# Altium PCB bch-stmnode_v0.2.PcbDoc (part 1 of 3)
Units mm, origin at the board's own origin, x right, y up, seen from the top; angles counter-clockwise.
Board outline 93.3 x 100 mm, 4 copper layers (Top Layer, GND, VCC, Bot Layer), stack 1.564 mm thick; 151 components, 115 nets, 605 pads, 422 vias.
Unrouted connection lines stored in the file: 4.
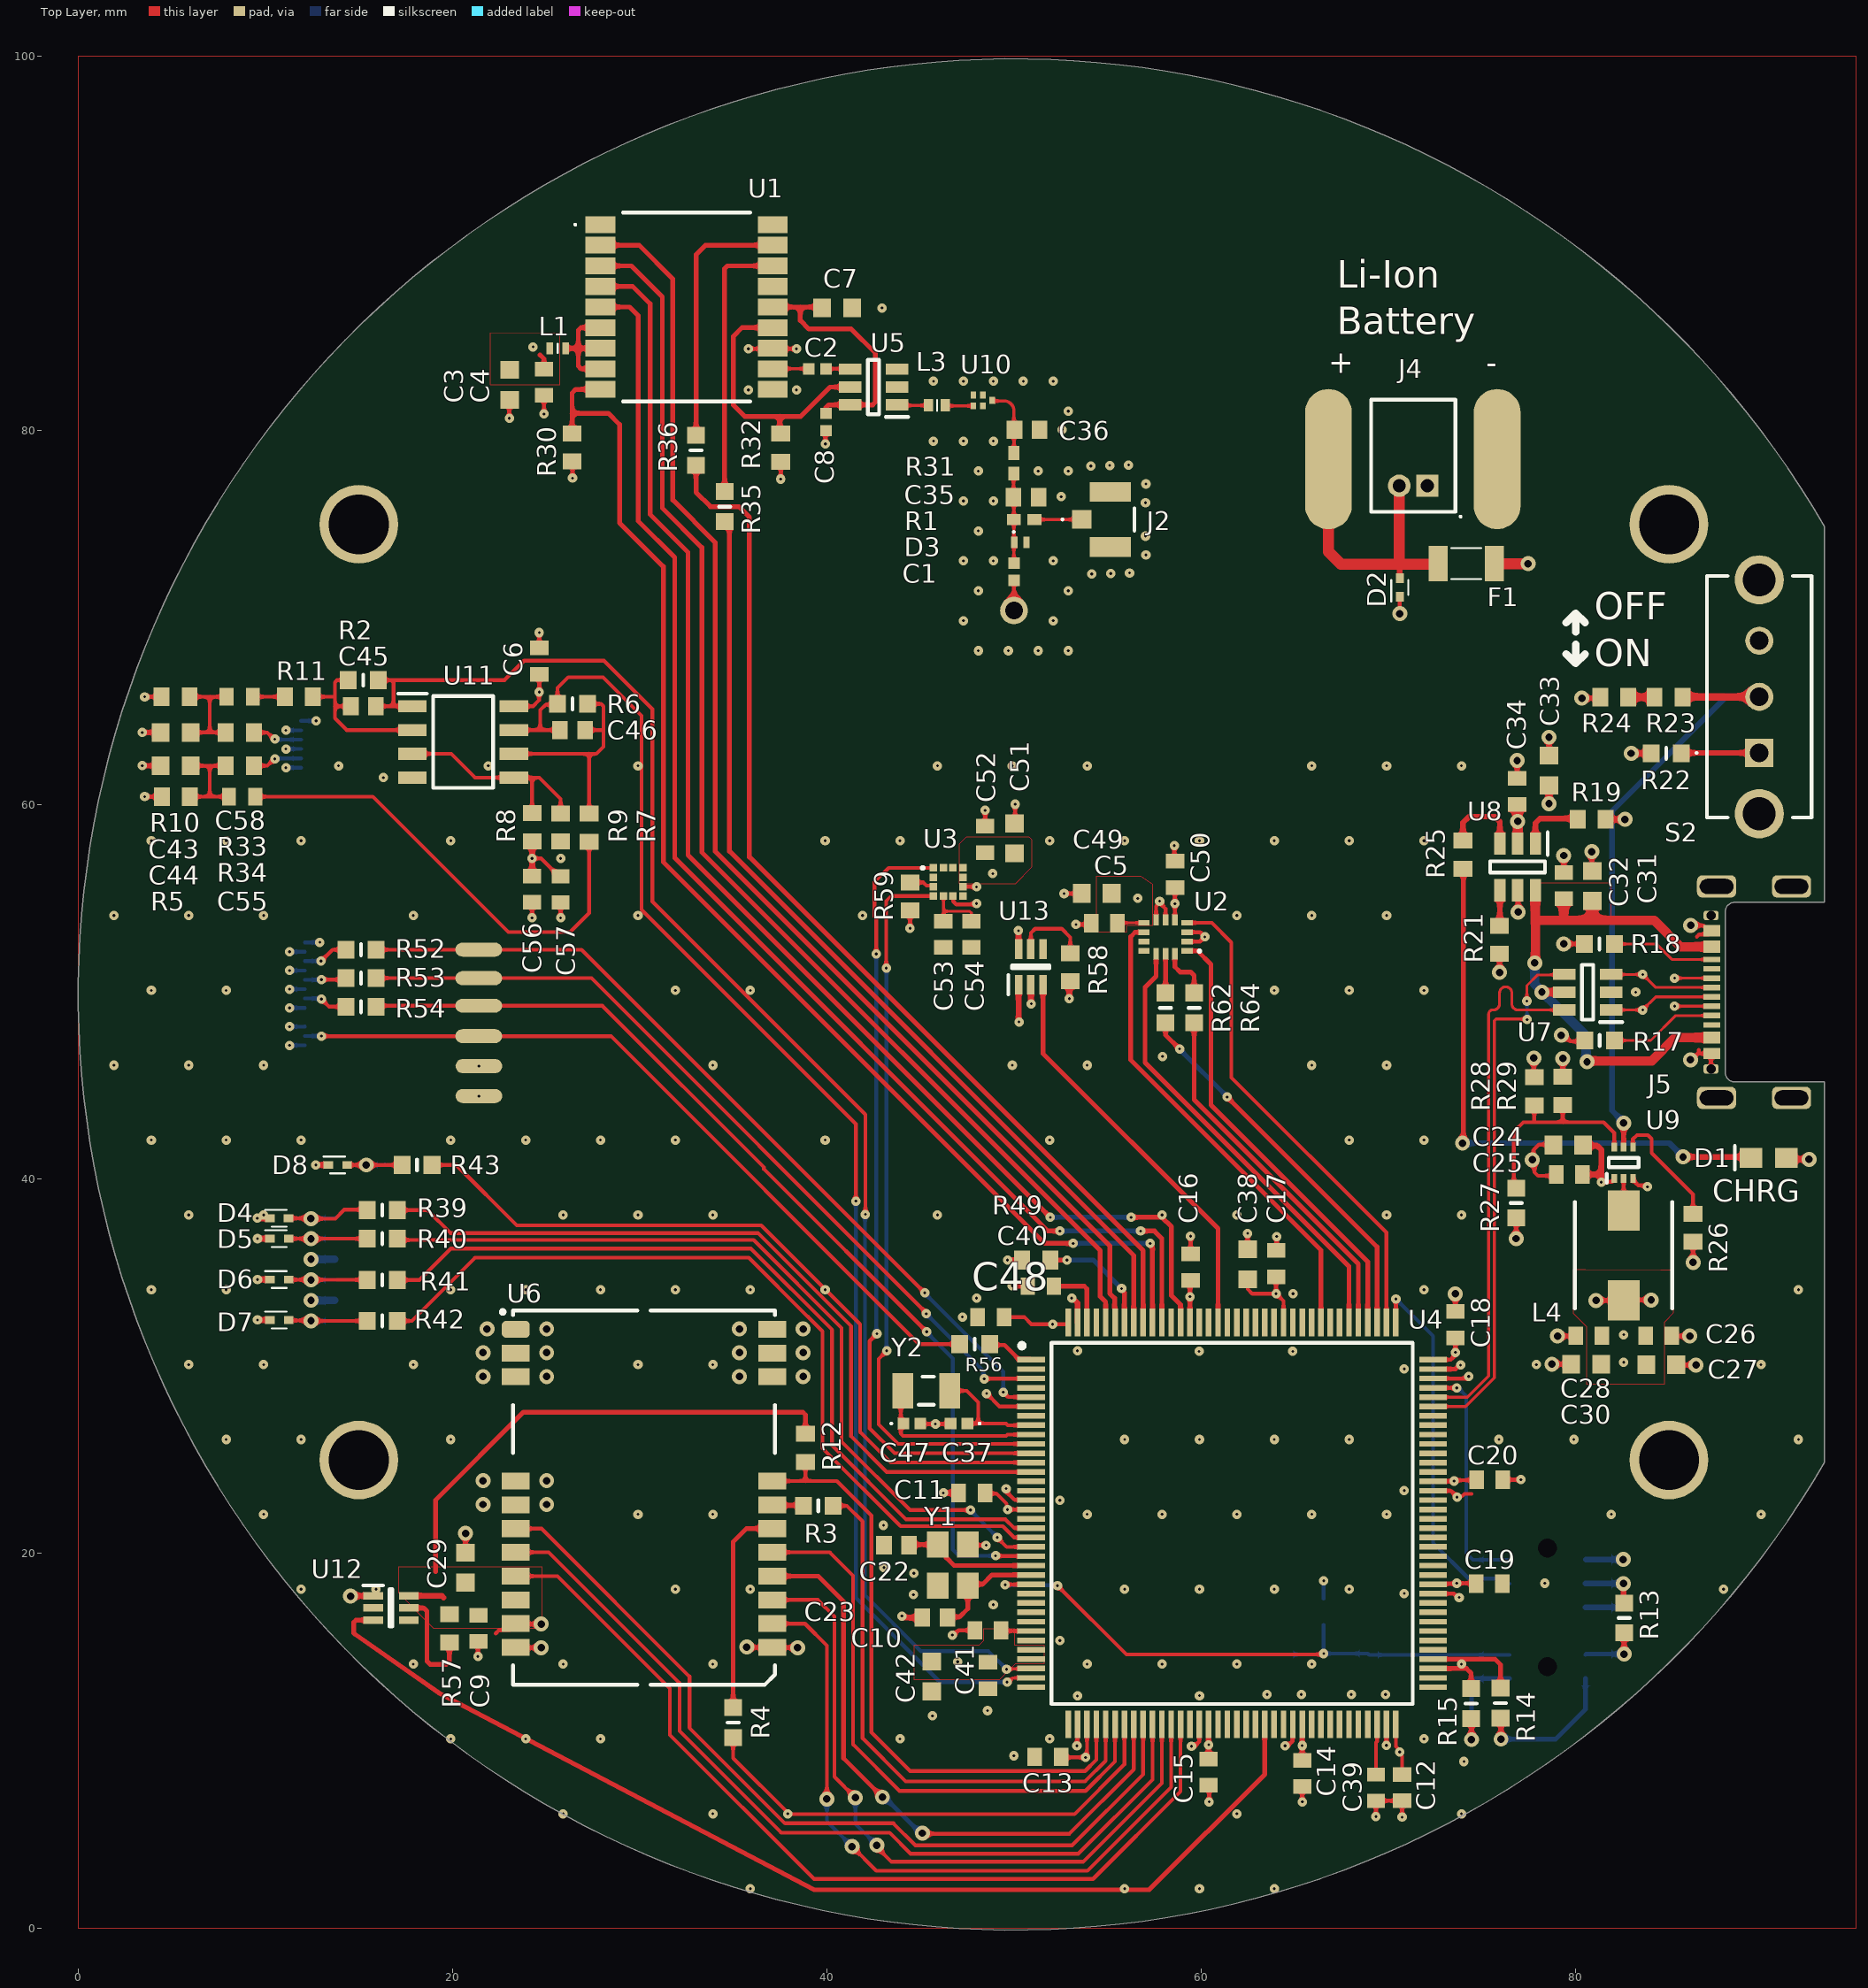
[diagram p0: Top Layer view]
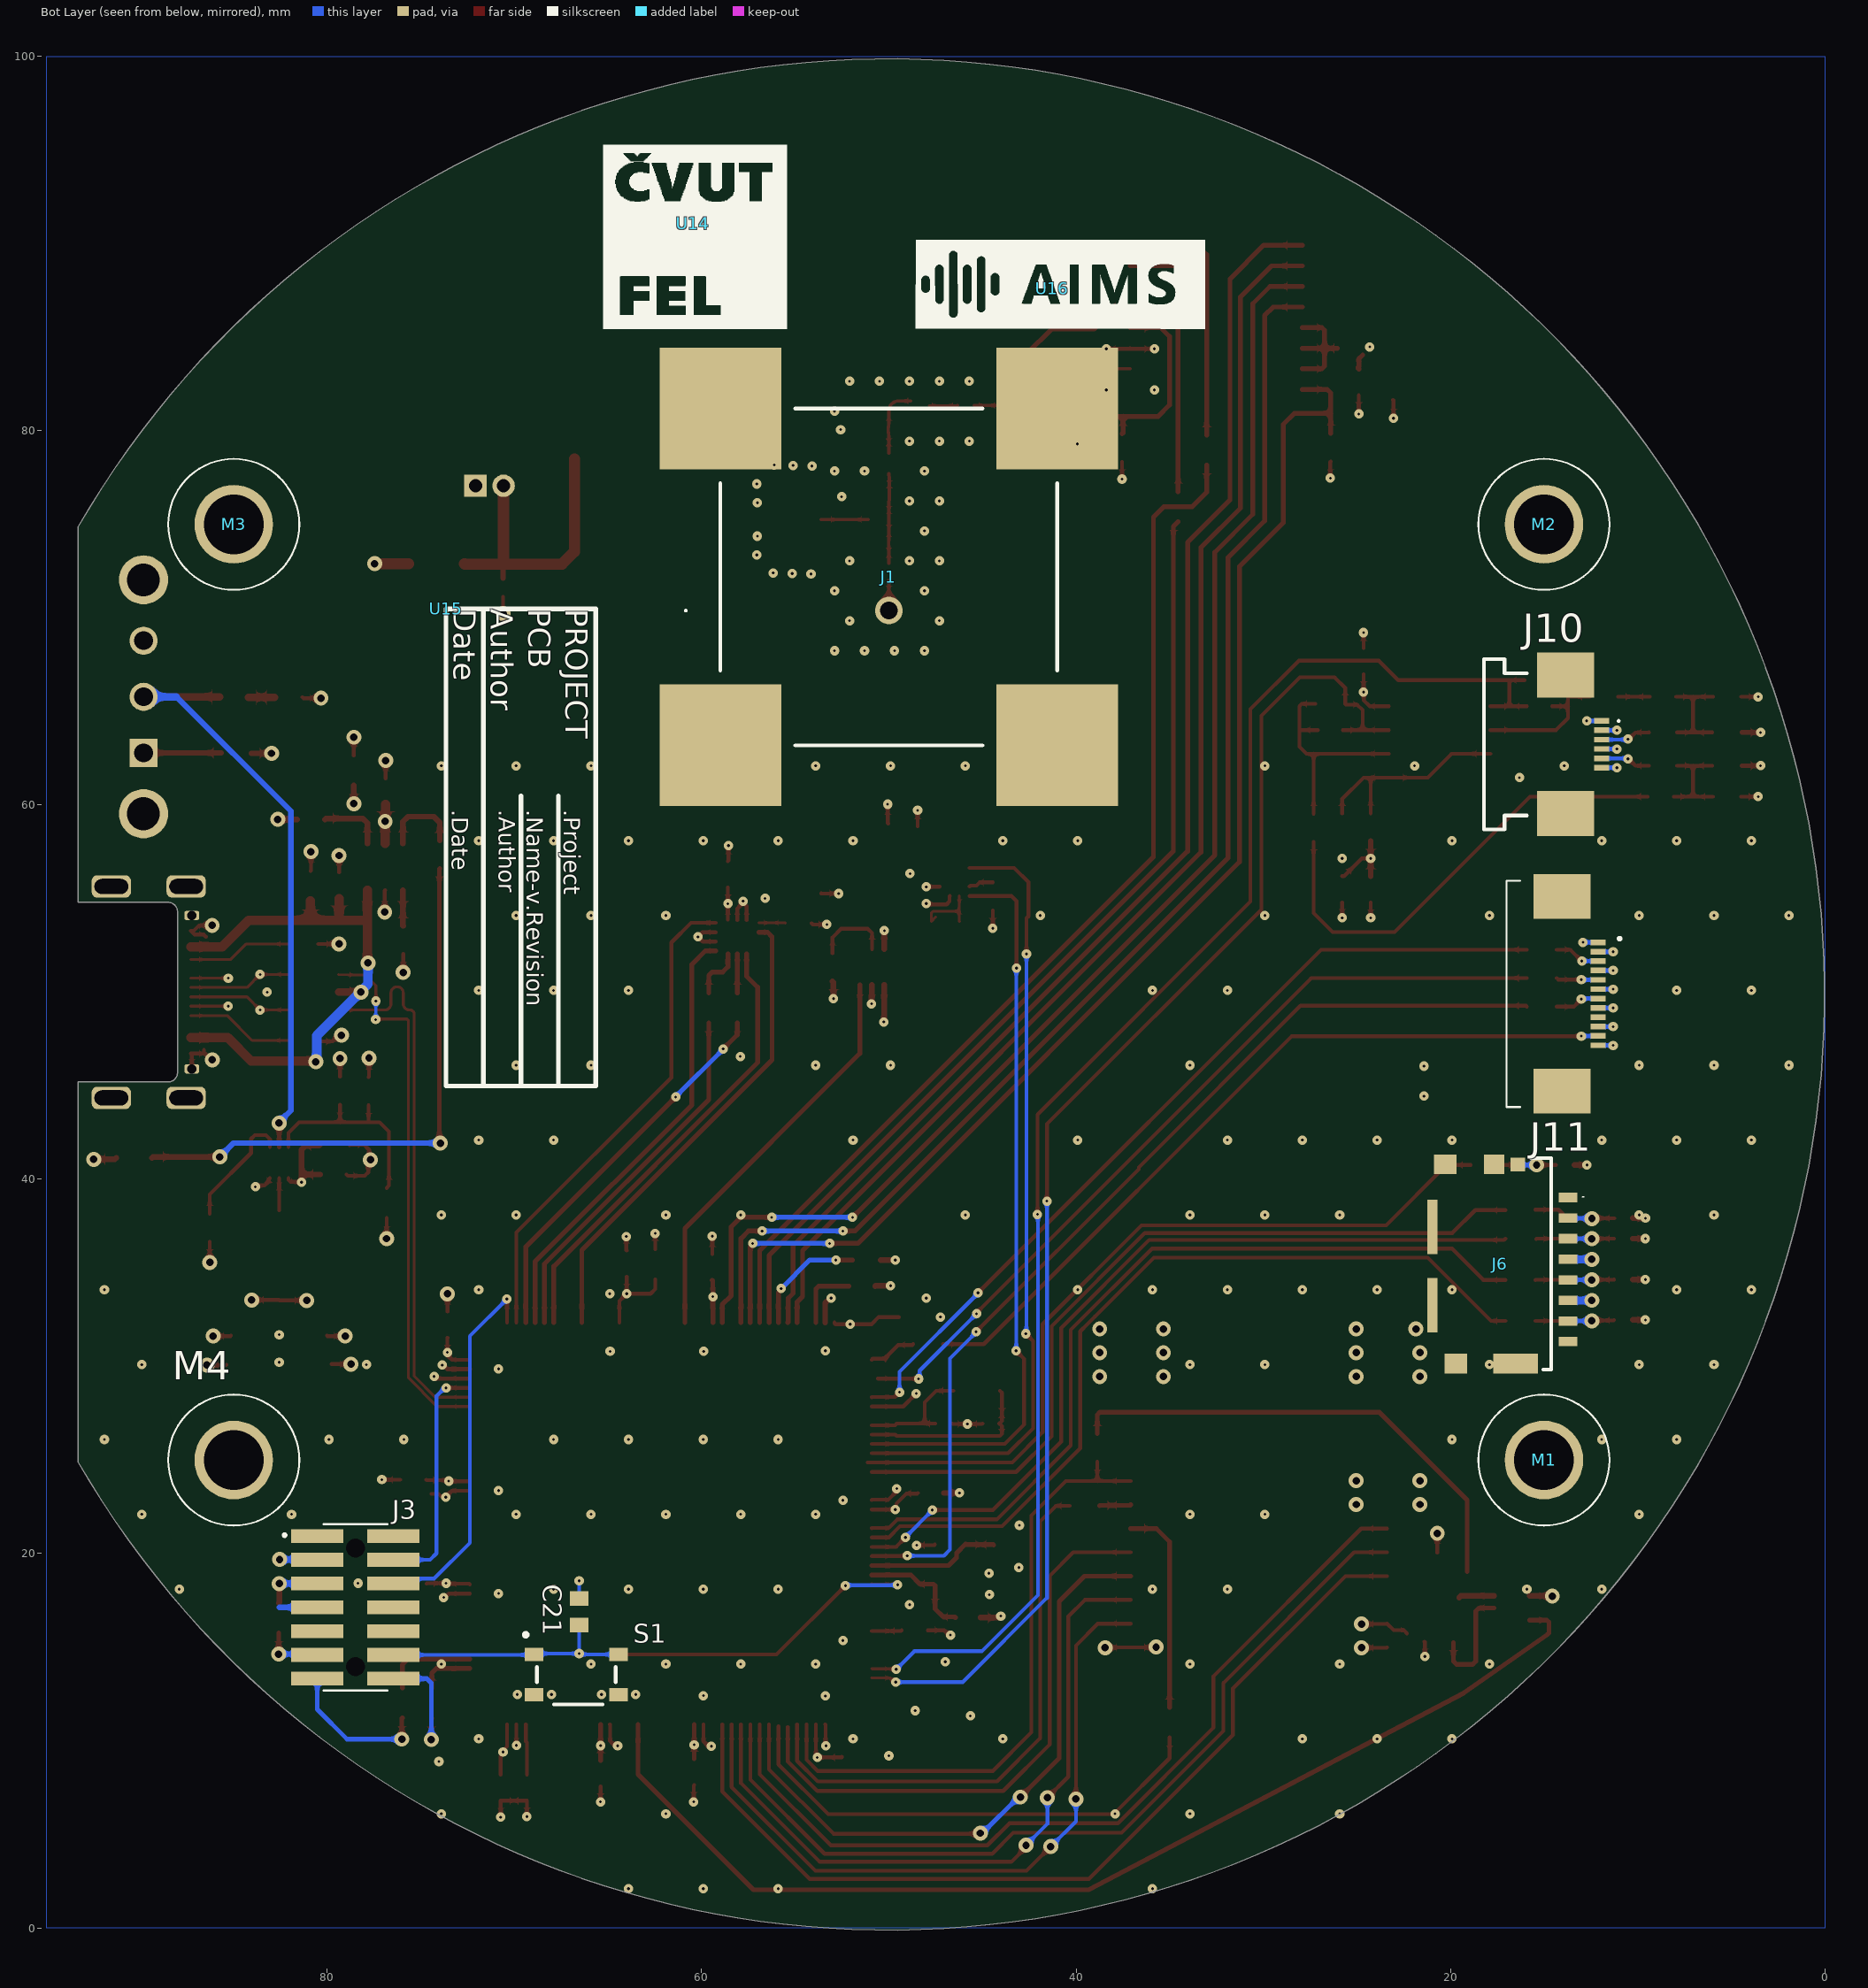
[diagram p1: Bot Layer view, seen from below]
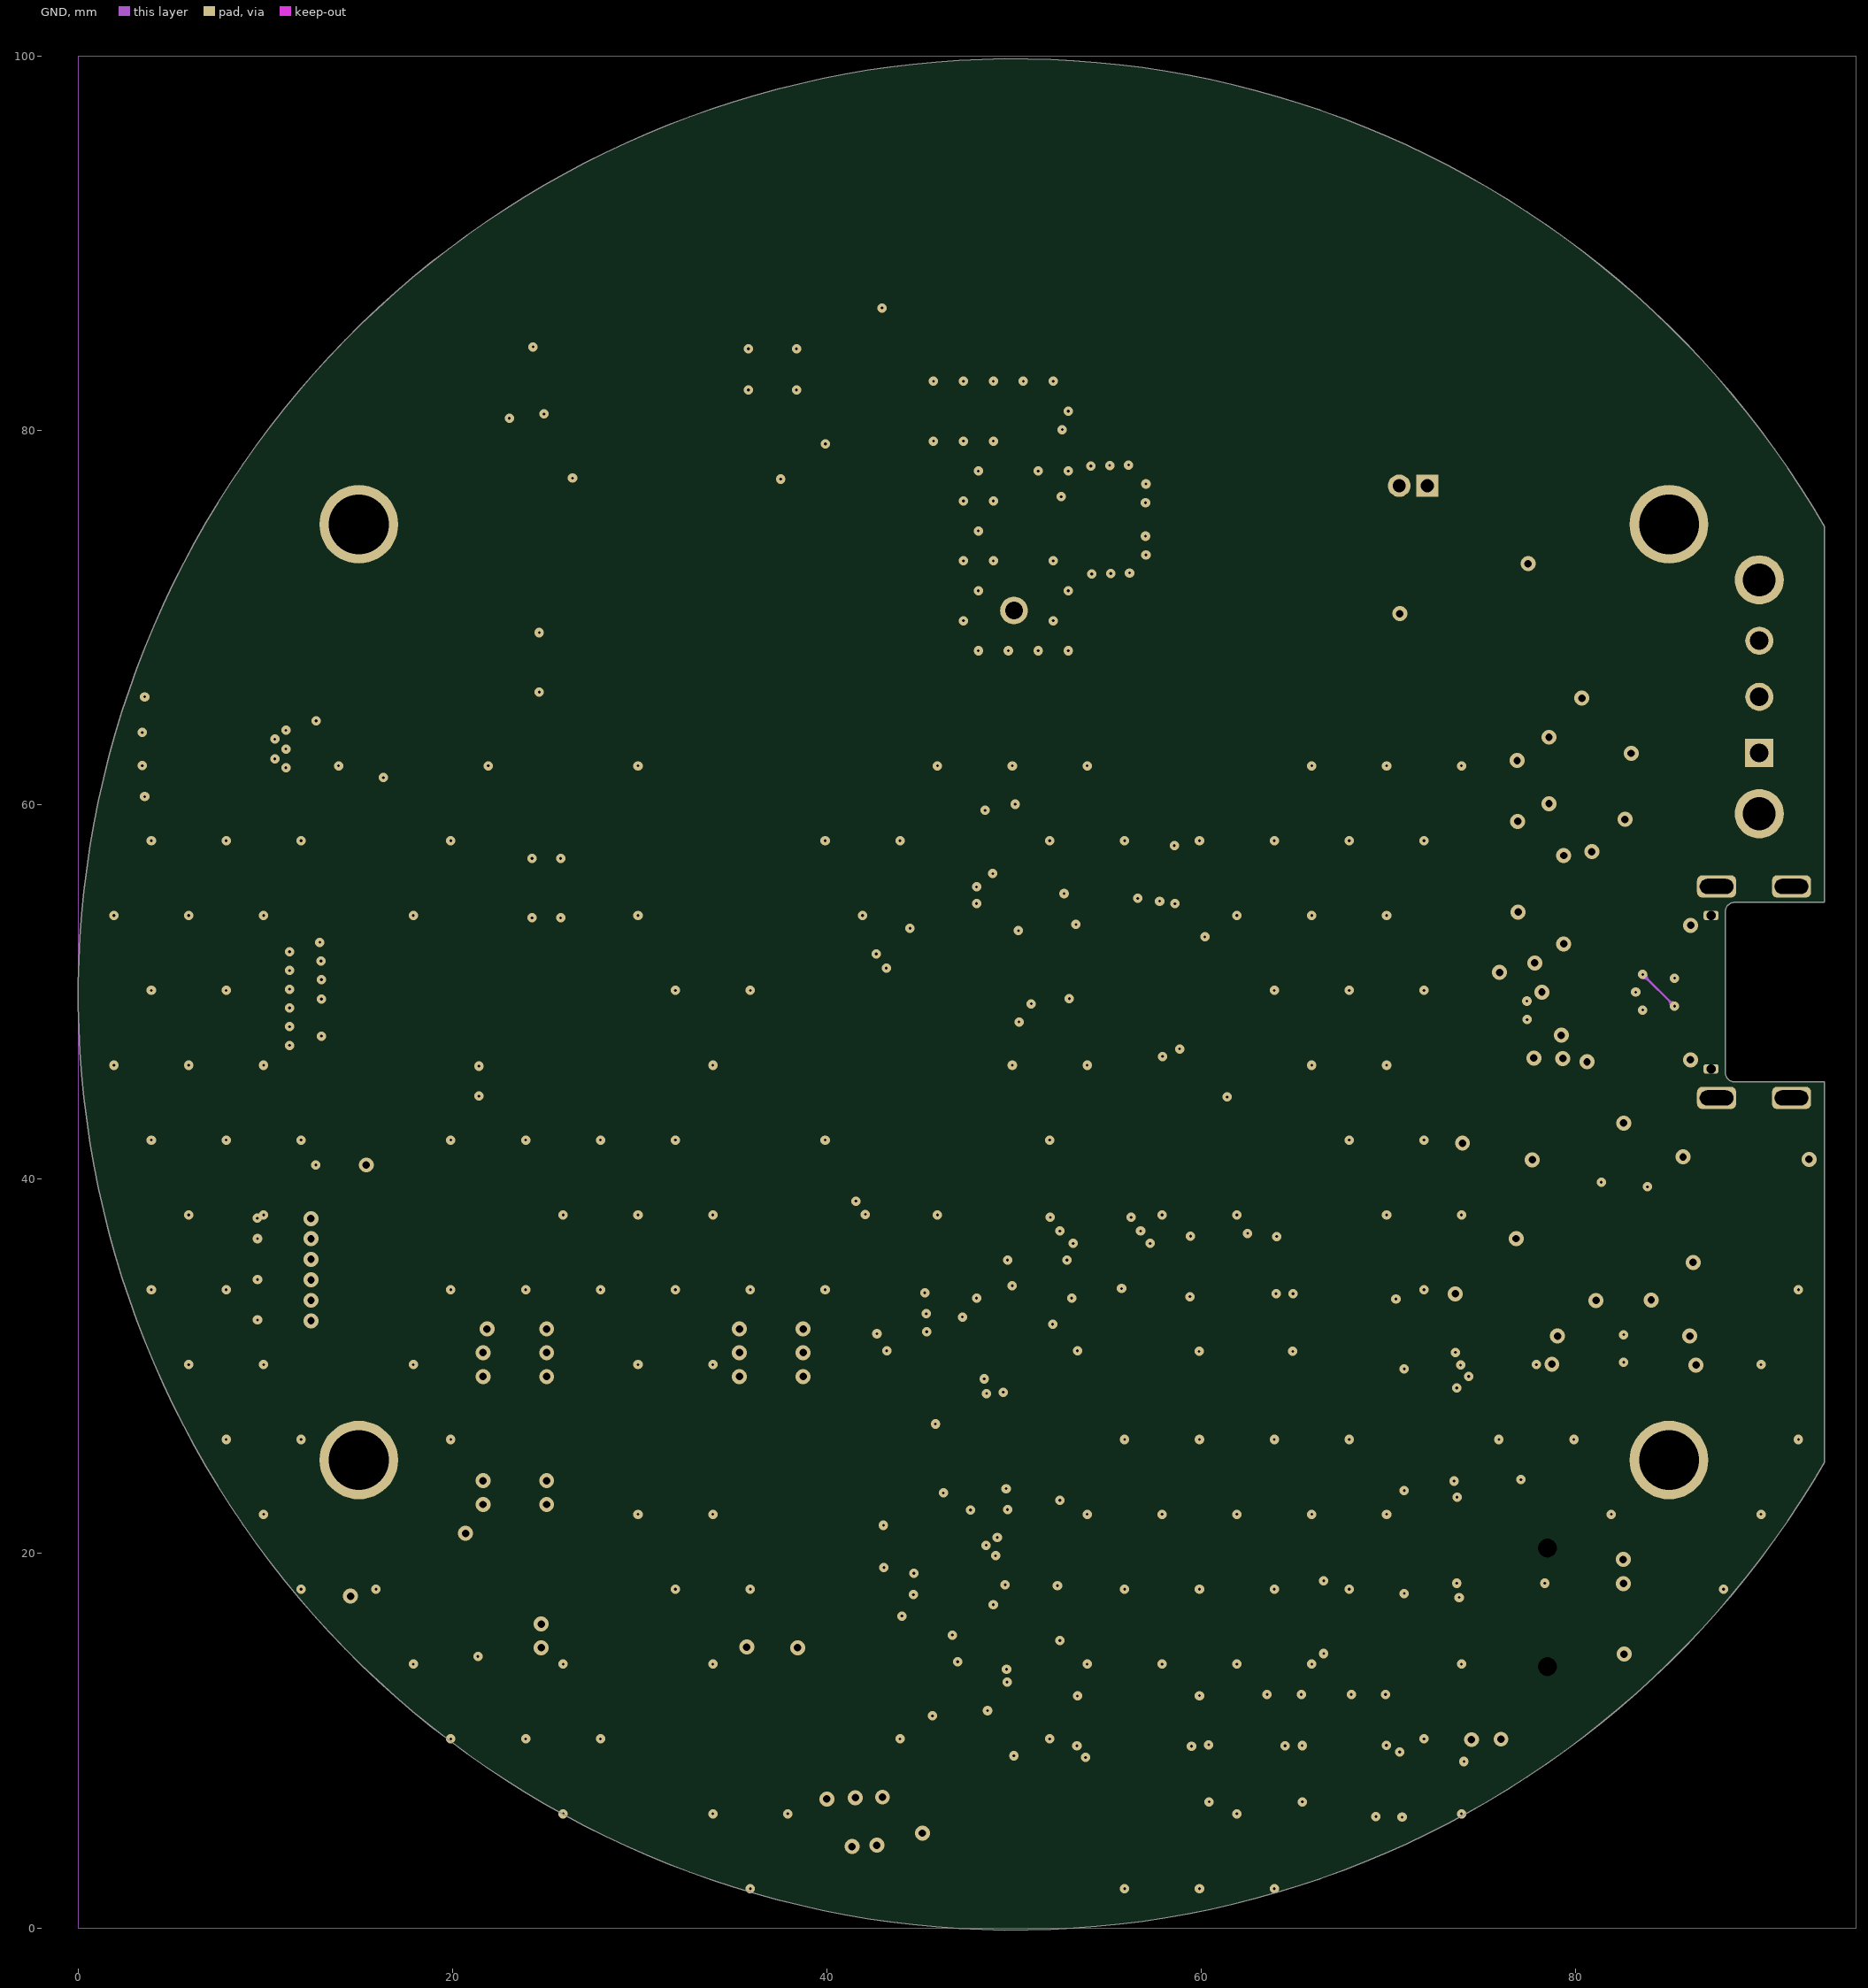
[diagram p2: GND]
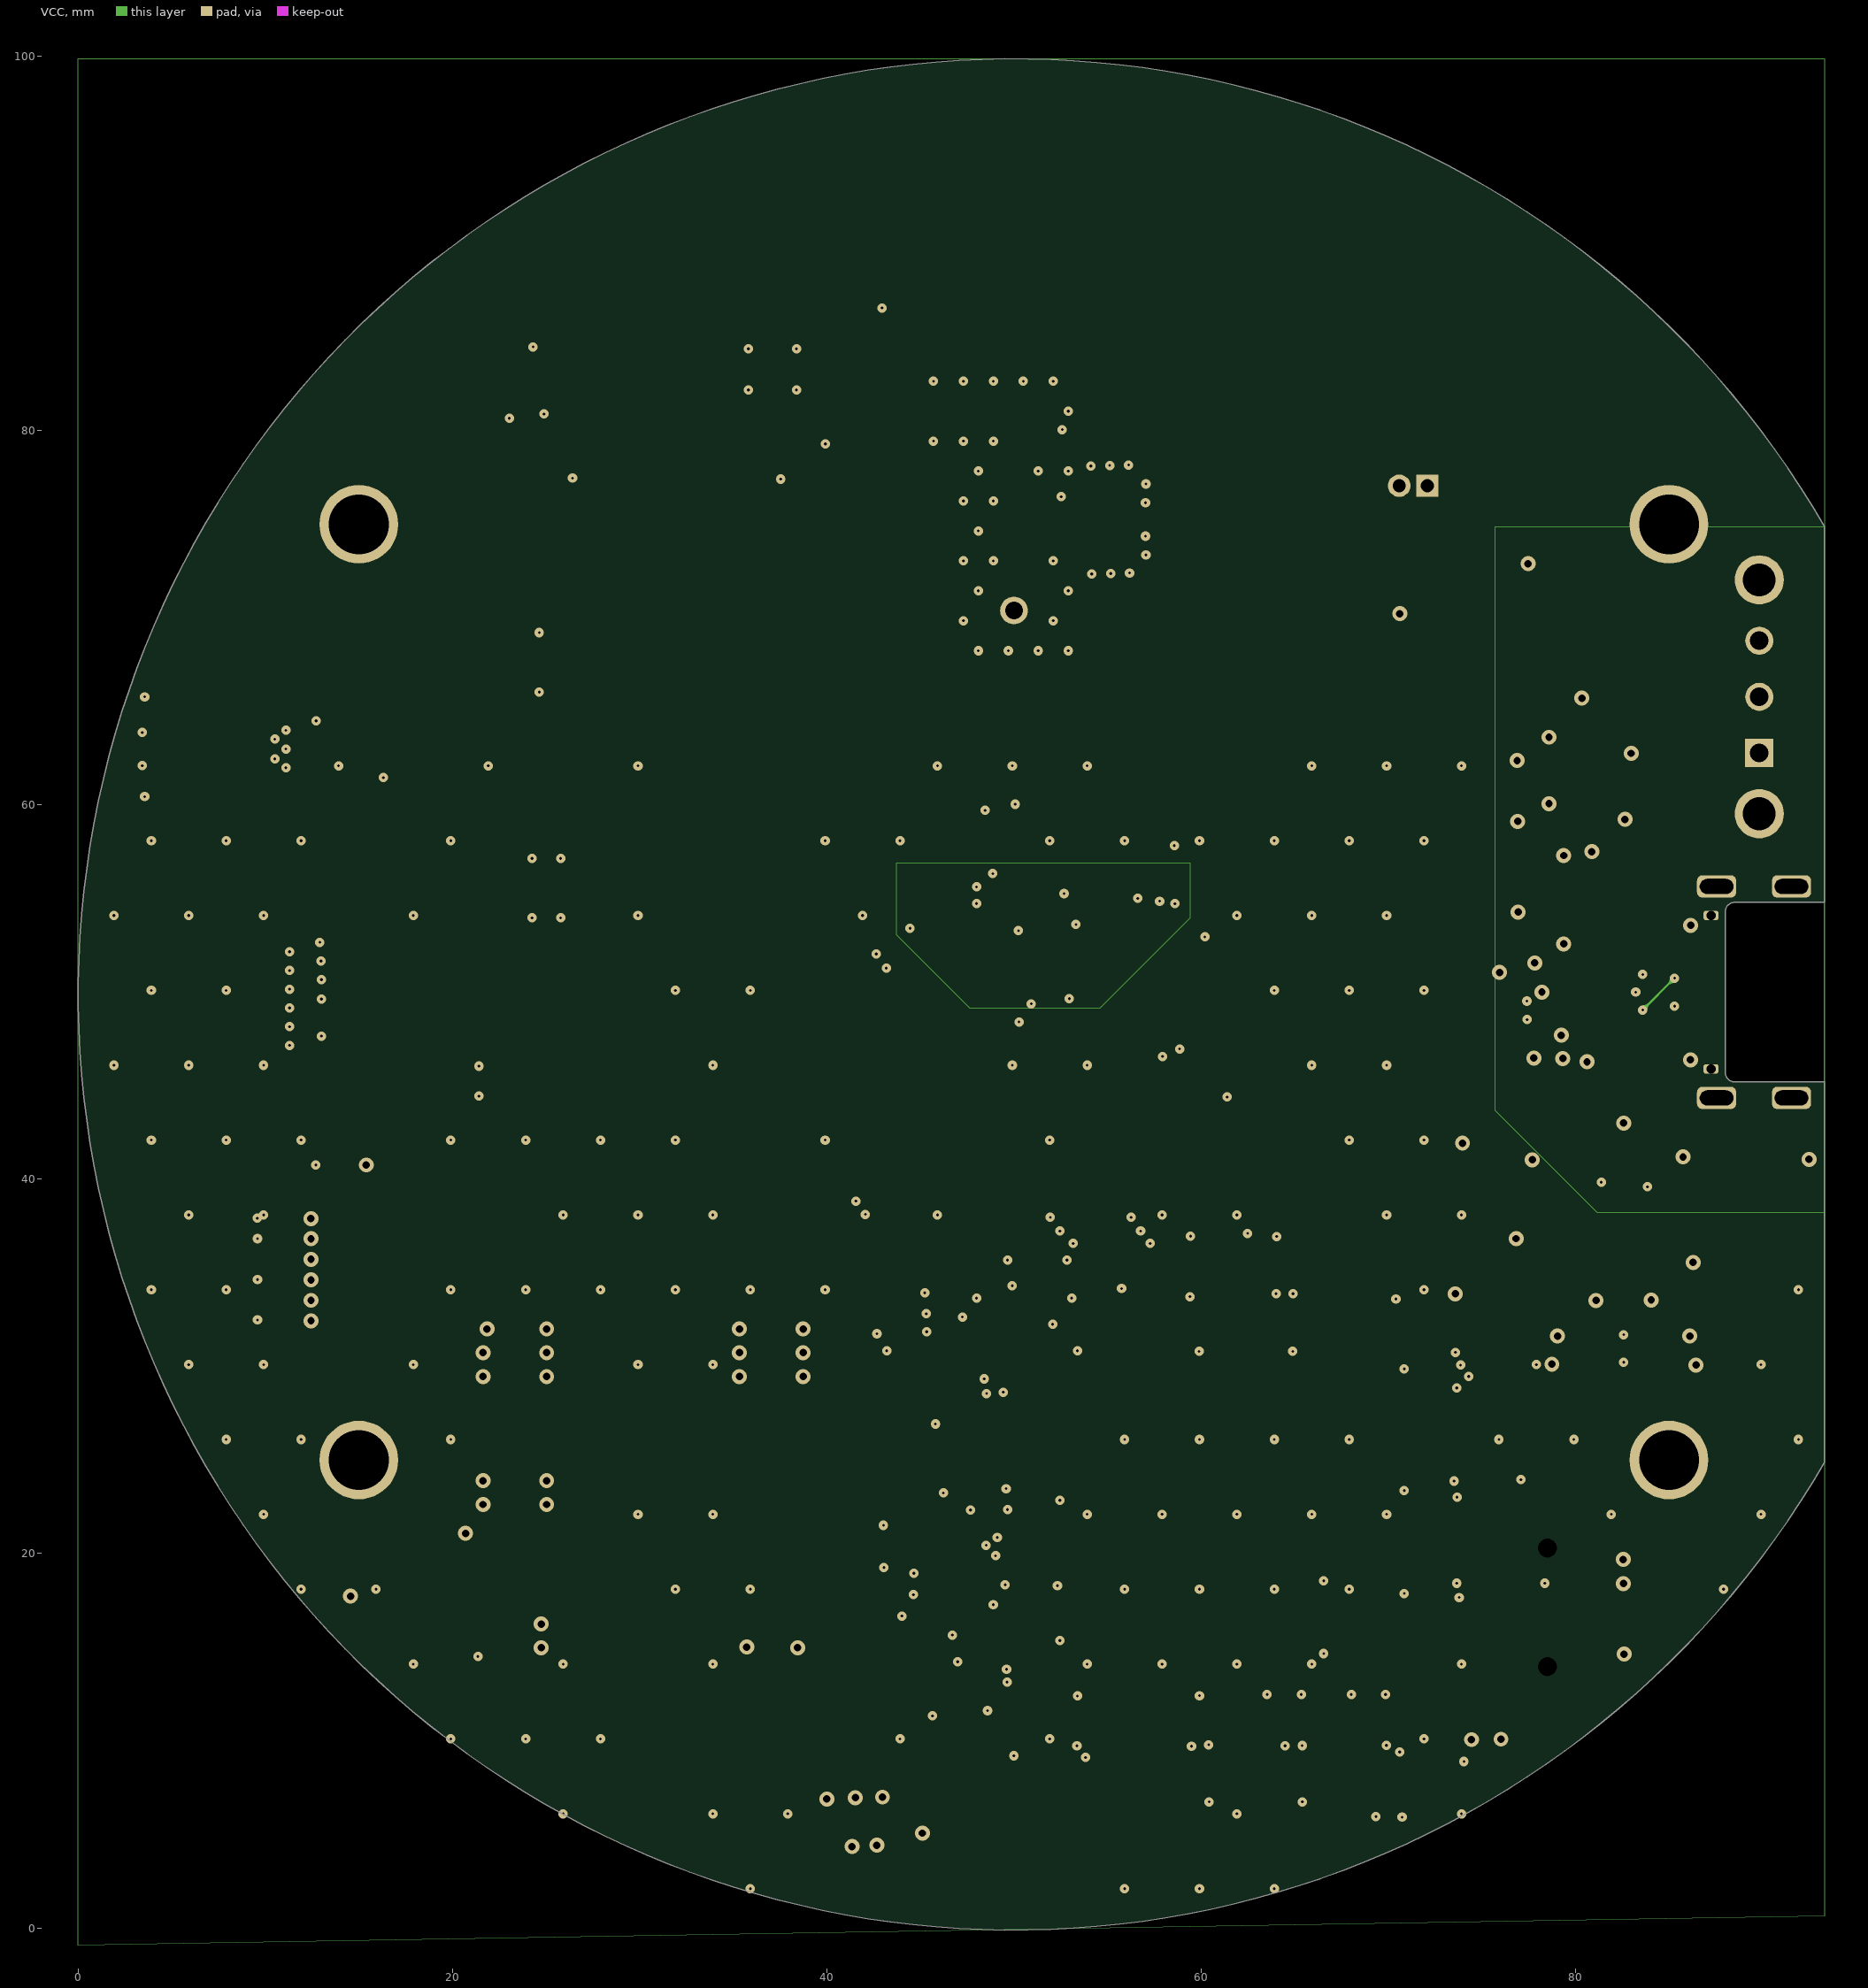
[diagram p3: VCC]
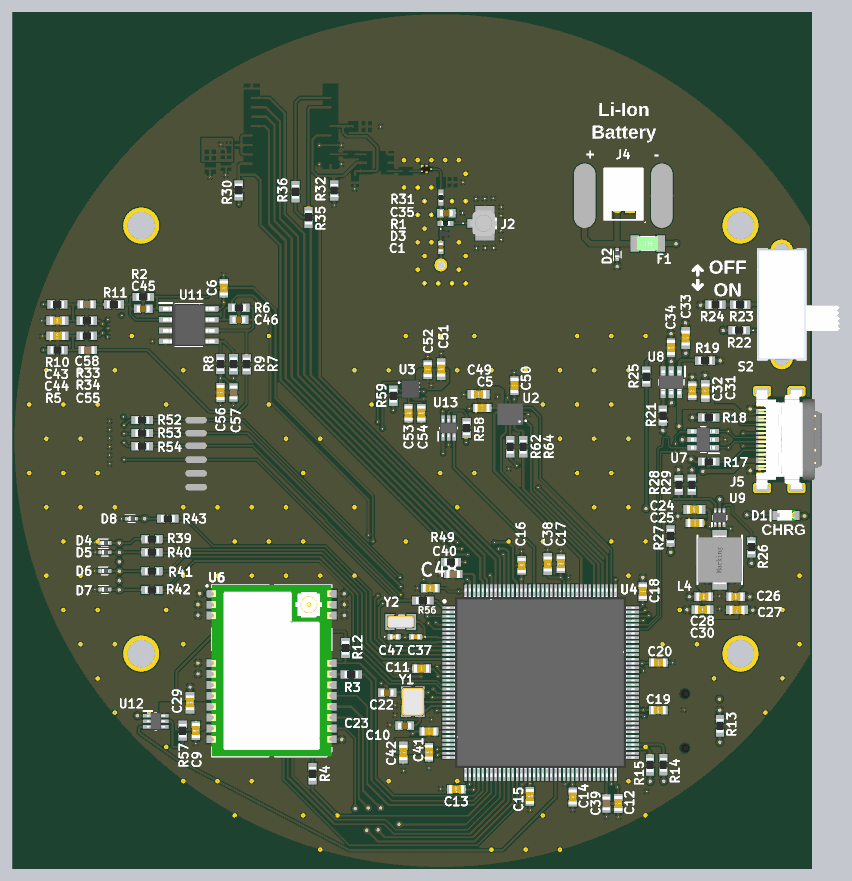
[diagram p5: 3D render of the assembled board from above, using the file's embedded part models]
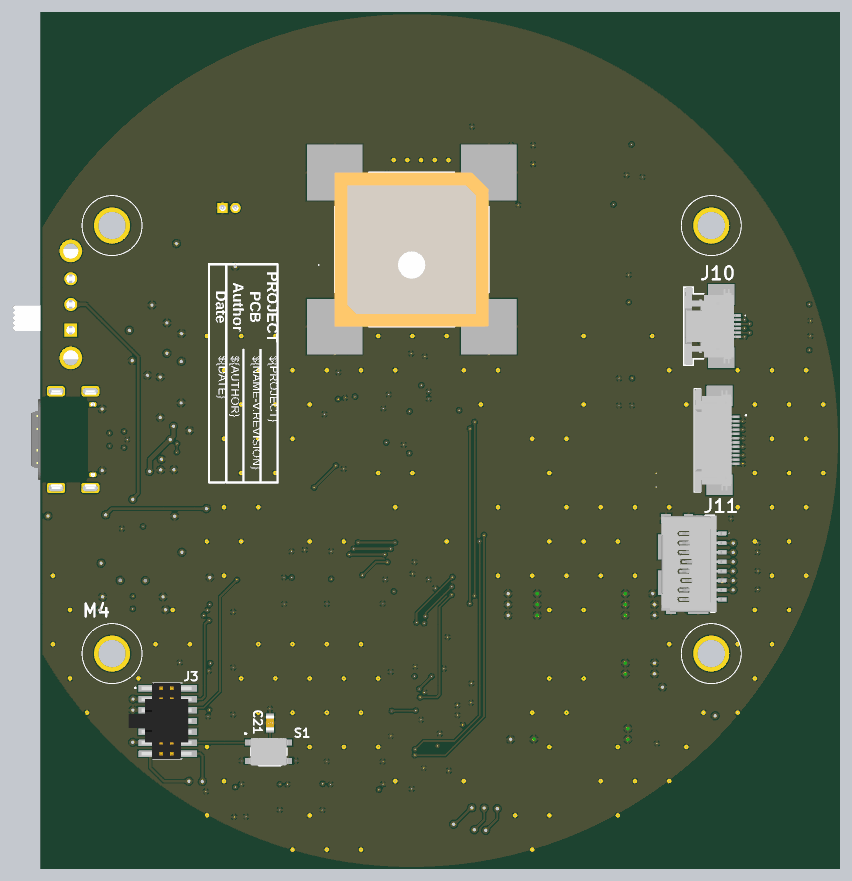
[diagram p6: 3D render of the assembled board from below, using the file's embedded part models]

## Layer stack, top to bottom
Top Solder: solder mask 0.0102, Solder Resist, Dk 3.5
Top Layer: signal copper 0.035
Dielectric 2: prepreg 0.0994, 3313, Dk 4.1
GND: signal copper 0.0152
Dielectric 1: dielectric 1.265, FR-4, Dk 4.6
VCC: signal copper 0.0152
Dielectric 3: prepreg 0.0994, 3313, Dk 4.1
Bot Layer: signal copper 0.035
Bottom Solder: solder mask 0.0102, Solder Resist, Dk 3.5

## Board outline
88.007,45.705 ccw(c88.508,45.705) 88.508,45.204 93.308,45.204 93.308,24.879 cw(c50.006,49.879) 93.308,74.879 93.308,54.8 88.508,54.8 ccw(c88.508,54.3) 88.007,54.3

## Design rules (kind name [scope] priority, off if disabled: settings)
BoardOutlineClearance [All] p1: gap=0.2 ignorepadtopadclearanceinfootprint=FALSE
Clearance [All] p1: gap=0.15 ignorepadtopadclearanceinfootprint=FALSE except(0.1: Arc-Arc Arc-Track Track-Track SMDPad-SMDPad SMDPad-THPad)
DiffPairsRouting USB90 [InDifferentialPairClass('USB')] p1: maxlimit=0.127 minlimit=0.127 mostfreqgap=0.127 toplayer_minwidth=0.15 toplayer_maxwidth=0.15 toplayer_prefwidth=0.15 midlayer1_minwidth=0.11 midlayer1_maxwidth=0.11 midlayer1_prefwidth=0.11 midlayer2_minwidth=0.11 midlayer2_maxwidth=0.11 midlayer2_prefwidth=0.11 bottomlayer_minwidth=0.15 bottomlayer_maxwidth=0.15 bottomlayer_prefwidth=0.15 impedanceprofiledriven=TRUE impedanceprofileid={9A58D23A-041B-4CB7-92BB-26AE1DAE706B} impedanceprofilevalue=90.000000 maxuncoupledlength=12.7
DiffPairsRouting RF50 [All] p2: maxlimit=0.254 minlimit=0.254 mostfreqgap=0.254 toplayer_minwidth=0.381 toplayer_maxwidth=0.381 toplayer_prefwidth=0.381 midlayer1_minwidth=0.381 midlayer1_maxwidth=0.381 midlayer1_prefwidth=0.381 midlayer2_minwidth=0.381 midlayer2_maxwidth=0.381 midlayer2_prefwidth=0.381 bottomlayer_minwidth=0.381 bottomlayer_maxwidth=0.381 bottomlayer_prefwidth=0.381 maxuncoupledlength=12.7
HoleSize [All] p1: absolutevalues=TRUE maxlimit=6.3 minlimit=0.15 maxpercent=80.000 minpercent=20.000
MatchedLengths [InDifferentialPairClass('USB')] p1: tolerance=25.4 checknetsindiffpair=TRUE checkdiffpairvsdiffpair=FALSE checkxsignals=FALSE checkothers=FALSE usedelayunits=TRUE delaytolerance=15.000000 phasematching=TRUE phasedelaytolerance=5.000000 phasedistance=12.7
MinimumSolderMaskSliver [All] p1: minsoldermaskwidth=0.1
PlaneConnect [All] p1: planeconnectstyle=Relief reliefexpansion=0.5 reliefentries=4 reliefconductorwidth=0.254 reliefairgap=0.15
PolygonConnect [All] p1: connectstyle=Relief reliefconductorwidth=0.254 reliefentries=4 polygonreliefangle="90 Angle" airgapwidth=0.15
RoutingVias [All] p1: holewidth=0.711 width=1.27 viastyle="Through Hole" minholewidth=0.15 minwidth=0.25 maxholewidth=1 maxwidth=1.5
SilkToSilkClearance [All] p1: silktosilkclearance=0.15
SilkToSolderMaskClearance [IsPad] p1: minsilkscreentomaskgap=0.15 clearancetoexposedcopper=TRUE
SolderMaskExpansion [All] p1: expansion=0.005 istentingtop=FALSE
SupplyNets "Schematic Supply Nets_7" [InNet('+VCAP1')] p1: voltage=0.000
SupplyNets "Schematic Supply Nets_6" [InNet('+VCAP2')] p2: voltage=0.000
SupplyNets "Schematic Supply Nets_4" [InNet('+3VLORA')] p3: voltage=0.000
SupplyNets "Schematic Supply Nets_3" [InNet('+3V')] p4: voltage=0.000
SupplyNets "Schematic Supply Nets_2" [InNet('+V_USB')] p5: voltage=0.000
SupplyNets "Schematic Supply Nets_1" [InNet('GND')] p6: voltage=0.000
SupplyNets "Schematic Supply Nets" [InNet('+3VIMU')] p7: voltage=0.000
Width Width_1 [InNetClass('50R_RF')] p1: maxlimit=0.175 minlimit=0.13 preferedwidth=0.175 toplayer_minwidth=0.175 midlayer1_maxwidth=0.13 midlayer1_prefwidth=0.13 midlayer2_maxwidth=0.13 midlayer2_prefwidth=0.13 bottomlayer_minwidth=0.175 impedanceprofiledriven=TRUE impedanceprofileid={F0846BDF-446F-457A-A208-F3BC433C4B43} impedanceprofilevalue=50.000000 minimp=50.000000 maximp=50.000000 favimp=50.000000
Width [All] p2: maxlimit=1 minlimit=0.15 preferedwidth=0.254 minimp=50.000000 maximp=50.000000 favimp=50.000000
24 further rules are at their usual default settings.

## Classes and differential pairs
net class C48_Nets: +3V GND
net class Y2_Nets: NetC37_1 NetC47_1
net class C47_Nets: GND NetC47_1
net class C37_Nets: GND NetC37_1
net class C6_Nets: +3V GND
net class C5_Nets: +3VIMU GND
component class U_project_info: M1 M2 M3 M4 U14 U15 U16
differential pair class USB: D_1 USB_D_1
net class Y1_Nets: GND NetC22_1 NetC23_1
net class U13_Nets: +3V +3VIMU GND NetR58_1 NetU4_128
net class U12_Nets: +3V +3VLORA GND NetR57_1 NetU4_58
net class U11_Nets: 1V65_REF_7 +3V GND NetC45_1 NetC45_2 NetC46_1 NetC46_2
net class U10_Nets: GND NetC36_1 NetL3_1
net class U9_Nets: BAT+ BAT_ULVO_5 GND NetL4_1 NetR26_1 V_FB_5
net class U8_Nets: +V_USB BAT+ GND NetR19_2 NetR21_2 NetR25_1
net class U7_Nets: +V_USB D_1_N D_1_P GND USB_D_1_N USB_D_1_P
net class U6_Nets: +3VLORA BUSY DIO1 DIO2 GND LORA_MISO LORA_NRST LORA_NSS LORA_RXEN LORA_TXEN NetR3_2 NetR4_2 NetU6_21
net class U5_Nets: ANT_OFF_3 GND NetC2_1 NetL3_2 VCC_RF_3
net class U4_Nets: 1PPS +3V +VCAP1 +VCAP2 BUSY CLK DIO1 DIO2 G\P\S\_\R\E\S\E\T\ GND GPS_RX GPS_SCL GPS_SDA GPS_TX GPS_WAKE-UP IMU_CS IMU_INT1 IMU_INT2 IMU_SCK IMU_SDI IMU_SDO LORA_MISO LORA_MOSI LORA_NRST LORA_NSS LORA_RXEN LORA_TXEN MAG_SCL MAG_SDA NetC22_1 NetC23_1 NetC37_1 NetC45_2 NetC46_2 NetC47_1 NetR49_1 NetU4_2 NetU4_4 NetU4_7 NetU4_8 NetU4_9 NetU4_12 NetU4_13 NetU4_14 NetU4_15 NetU4_18 NetU4_19 NetU4_20 NetU4_21 NetU4_36 NetU4_37 NetU4_50 NetU4_53 NetU4_54 NetU4_55 NetU4_56 NetU4_57 NetU4_58 NetU4_60 NetU4_63 NetU4_64 NetU4_65 NetU4_66 NetU4_67 NetU4_68 NetU4_77 NetU4_78 NetU4_79 NetU4_80 NetU4_81 NetU4_82 NetU4_85 NetU4_86 NetU4_87 NetU4_88 NetU4_89 NetU4_90 NetU4_91 NetU4_92 NetU4_93 NetU4_96 NetU4_97 NetU4_98 NetU4_99 NetU4_100 NetU4_101 NetU4_102 NetU4_110 NetU4_116 NetU4_118 NetU4_119 NetU4_122 NetU4_123 NetU4_124 NetU4_125 NetU4_126 NetU4_127 NetU4_128 NetU4_129 NetU4_133 NetU4_139 NetU4_140 NetU4_141 NRST_2 PDM_CLK_1 PDM_D1_1 PDM_D2_1 PDM_D3_1 SD_CS SD_DET SD_MISO SD_MOSI SD_SCK SWCLK_2 SWDIO_2 USB_D_1_N USB_D_1_P VCP_RX_2 VCP_TX_2
net class U3_Nets: +3VIMU GND MAG_SCL MAG_SDA NetC53_1 NetR59_1 NetU3_7
net class U2_Nets: +3VIMU GND IMU_CS IMU_INT1 IMU_INT2 IMU_SDO NetR62_1 NetR64_1 NetU2_10 NetU2_11
net class U1_Nets: 1PPS ANT_OFF_3 G\P\S\_\R\E\S\E\T\ GND GPS_RX GPS_TX GPS_WAKE-UP NetC2_2 NetL1_2 SCL_3 SDA_3 VCC_RF_3
net class S2_Nets: BAT_ULVO_5 GND NetR22_1
net class S1_Nets: GND NRST_2
net class R64_Nets: IMU_SDI NetR64_1
net class R62_Nets: IMU_SCK NetR62_1
net class R59_Nets: +3VIMU NetR59_1
net class R58_Nets: +3VIMU NetR58_1
net class R57_Nets: +3VLORA NetR57_1
net class R56_Nets: NetJ11_11 PDM_CLK_1
net class R54_Nets: NetJ11_7 PDM_D3_1
net class R53_Nets: NetJ11_5 PDM_D2_1
net class R52_Nets: NetJ11_3 PDM_D1_1
net class R49_Nets: GND NetR49_1
net class R43_Nets: NetD8_2 SD_DET
net class R42_Nets: NetD7_2 SD_MISO
net class R41_Nets: NetD6_2 SD_SCK
net class R40_Nets: NetD5_2 SD_MOSI
net class R39_Nets: NetD4_2 SD_CS
net class R36_Nets: GPS_SCL SCL_3
net class R35_Nets: GPS_SDA SDA_3
net class R34_Nets: NetC44_1 NetJ10_5
net class R33_Nets: NetC43_1 NetJ10_3
net class R32_Nets: ANT_OFF_3 GND
net class R31_Nets: NetC1_2 NetC36_1
net class R30_Nets: +3V G\P\S\_\R\E\S\E\T\
net class R29_Nets: GND V_FB_5
net class R28_Nets: GND V_FB_5
net class R27_Nets: +3V V_FB_5
net class R26_Nets: +3V NetR26_1
net class R25_Nets: NetD1_2 NetR25_1
net class R24_Nets: GND NetR23_1
net class R23_Nets: BAT_ULVO_5 NetR23_1
net class R22_Nets: BAT+ NetR22_1
net class R21_Nets: GND NetR21_2
net class R19_Nets: GND NetR19_2
net class R18_Nets: GND NetJ5_B5
net class R17_Nets: GND NetJ5_A5
net class R15_Nets: NetJ3_14 VCP_RX_2
net class R14_Nets: NetJ3_13 VCP_TX_2
net class R13_Nets: GND NetJ3_11
net class R12_Nets: +3VLORA LORA_NSS
net class R11_Nets: NetC45_1 NetC58_2
net class R10_Nets: +3V NetC43_1
net class R9_Nets: 1V65_REF_7 GND
net class R8_Nets: 1V65_REF_7 +3V
net class R7_Nets: NetC46_1 NetC55_2
net class R6_Nets: NetC46_1 NetC46_2
net class R5_Nets: +3V NetC44_1
net class R4_Nets: LORA_MOSI NetR4_2
net class R3_Nets: CLK NetR3_2
net class R2_Nets: NetC45_1 NetC45_2
net class R1_Nets: NetC1_2 NetJ2_1
net class L4_Nets: +3V NetL4_1
net class L3_Nets: NetL3_1 NetL3_2
net class L1_Nets: +3V NetL1_2
net class J11_Nets: +3V GND NetJ11_3 NetJ11_5 NetJ11_7 NetJ11_9 NetJ11_11 NetJ11_MP1 NetJ11_MP2
net class J10_Nets: +3V GND NetJ10_3 NetJ10_5 NetJ10_7 NetJ10_8
net class J6_Nets: +3V GND NetD4_2 NetD5_2 NetD6_2 NetD7_2 NetD8_2 NetJ6_1 NetJ6_4 NetJ6_8
net class J5_Nets: +V_USB D_1_N D_1_P GND NetJ5_A5 NetJ5_A8 NetJ5_B5 NetJ5_B8
net class J4_Nets: GND NetD2_2
net class J3_Nets: +3V GND NetJ3_1 NetJ3_2 NetJ3_8 NetJ3_9 NetJ3_10 NetJ3_11 NetJ3_13 NetJ3_14 NRST_2 SWCLK_2 SWDIO_2
net class J2_Nets: GND NetJ2_1
net class J1_Nets: GND NetC1_1
net class F1_Nets: BAT+ NetD2_2
net class D8_Nets: GND NetD8_2
net class D7_Nets: GND NetD7_2
net class D6_Nets: GND NetD6_2
net class D5_Nets: GND NetD5_2
net class D4_Nets: GND NetD4_2
net class D3_Nets: GND NetC1_2
net class D2_Nets: GND NetD2_2
net class D1_Nets: BAT+ NetD1_2
net class C58_Nets: NetC43_1 NetC58_2
net class C57_Nets: +3V GND
net class C56_Nets: +3V GND
net class C55_Nets: NetC44_1 NetC55_2
net class C54_Nets: GND NetC53_1
net class C53_Nets: GND NetC53_1
net class C52_Nets: +3VIMU GND
net class C51_Nets: +3VIMU GND
net class C50_Nets: +3VIMU GND
net class C49_Nets: +3VIMU GND
net class C46_Nets: NetC46_1 NetC46_2
net class C45_Nets: NetC45_1 NetC45_2
net class C44_Nets: GND NetC44_1
net class C43_Nets: GND NetC43_1
net class C42_Nets: +3V GND
net class C41_Nets: +3V GND
net class C40_Nets: +VCAP2 GND
net class C39_Nets: +VCAP1 GND
net class C38_Nets: +3V GND
net class C36_Nets: GND NetC36_1
net class C35_Nets: GND NetC1_2
net class C34_Nets: BAT+ GND
net class C33_Nets: BAT+ GND
net class C32_Nets: +V_USB GND
net class C31_Nets: +V_USB GND
net class C30_Nets: +3V GND
net class C29_Nets: +3VLORA GND
net class C28_Nets: +3V GND
net class C27_Nets: +3V GND
net class C26_Nets: +3V GND
net class C25_Nets: BAT+ GND
net class C24_Nets: BAT+ GND
net class C23_Nets: GND NetC23_1
net class C22_Nets: GND NetC22_1
net class C21_Nets: GND NRST_2
net class C20_Nets: +3V GND
net class C19_Nets: +3V GND
net class C18_Nets: +3V GND
net class C17_Nets: +3V GND
net class C16_Nets: +3V GND
net class C15_Nets: +3V GND
net class C14_Nets: +3V GND
net class C13_Nets: +3V GND
net class C12_Nets: +3V GND
net class C11_Nets: +3V GND
net class C10_Nets: +3V GND
net class C9_Nets: +3VLORA GND
net class C8_Nets: GND VCC_RF_3
net class C7_Nets: GND VCC_RF_3
net class C4_Nets: +3V GND
net class C3_Nets: +3V GND
net class C2_Nets: NetC2_1 NetC2_2
net class C1_Nets: NetC1_1 NetC1_2
net class 50R_RF: NetC1_1 NetC1_2 NetC2_1 NetC2_2 NetC36_1 NetJ2_1 NetL3_1 NetL3_2
component class U_power: C24 C25 C26 C27 C28 C30 C31 C32 C33 C34 D1 L4 R19 R21 R22 R23 R24 R25 R26 R27 R28 R29 R57 R58 S2 U8 U9 U12 U13
component class U_mcu: C10 C11 C12 C13 C14 C15 C16 C17 C18 C19 C20 C21 C22 C23 C37 C38 C39 C40 C41 C42 C47 C48 J3 R13 R14 R15 R49 S1 U4 Y1 Y2
component class U_lora: C9 C29 R3 R4 R12 U6
component class U_imu: C5 C49 C50 C51 C52 C53 C54 R59 R62 R64 U2 U3
component class U_gps: C1 C2 C3 C4 C7 C8 C35 C36 D3 J1 J2 L1 L3 R1 R30 R31 R32 R35 R36 U1 U5 U10
component class U_analog_mics: C6 C43 C44 C45 C46 C55 C56 C57 C58 R2 R5 R6 R7 R8 R9 R10 R11 R33 R34 U11
component class top: D2 D4 D5 D6 D7 D8 F1 J4 J5 J6 J10 J11 R17 R18 R39 R40 R41 R42 R43 R52 R53 R54 R56 U7
differential pair D_1: +D_1_P -D_1_N
differential pair USB_D_1: +USB_D_1_P -USB_D_1_N

## Components (designator, comment, footprint, x,y, rotation, side; value= is the part's Value field where it differs from the comment)
C1 "120p" CAPC1005X55N 50,72.465 r90 top
C2 "120p" CAPC1005X55N 39.497,83.312 r180 top
C3 "10u" C0603 23.063,82.448 r270 top
C4 "0.1u" CAPC1608X95N 24.892,82.601 r270 top
C5 "0.1u" CAPC1608X95N 54.825,53.683 r180 top
C6 "0.1u" CAPC1608X95N 24.638,67.691 r90 top
C7 "10u" C0603 40.551,86.563 r0 top
C8 "120p" CAPC1005X55N 39.954,80.467 r90 top
C9 "0.1u" CAPC1608X95N 21.387,16.002 r270 top
C10 "0.1u" CAPC1608X95N 48.616,15.9 r180 top
C11 "0.1u" CAPC1608X95N 47.752,23.241 r180 top
C12 "0.1u" CAPC1608X95N 70.739,7.493 r270 top
C13 "0.1u" CAPC1608X95N 51.816,9.144 r180 top
C14 "0.1u" CAPC1608X95N 65.405,8.255 r270 top
C15 "0.1u" CAPC1608X95N 60.401,8.331 r270 top
C16 "0.1u" CAPC1608X95N 59.436,35.306 r90 top
C17 "0.1u" CAPC1608X95N 64.008,35.495 r90 top
C18 "0.1u" CAPC1608X95N 73.584,32.233 r90 top
C19 "0.1u" CAPC1608X95N 75.391,18.397 r0 top
C20 "0.1u" CAPC1608X95N 75.413,23.952 r0 top
C21 "0.1u" CAPC1608X95N 66.548,16.891 r90 bottom
C22 "12p" CAPC1608X97N 43.723,20.447 r180 top
C23 "12p" CAPC1608X97N 45.778,16.58 r180 top
C24 "10u" C0603 79.616,41.834 r180 top
C25 "0.1u" CAPC1608X95N 79.68,40.259 r180 top
C26 "1n" CAPC1608X87N 84.455,31.648 r0 top
C27 "20u" C0603 84.582,30.099 r0 top
C28 "0.1u" CAPC1608X95N 80.721,31.648 r180 top
C29 "20u" C0603 20.701,19.253 r90 top
C30 "20u" C0603 80.569,30.124 r180 top
C31 "10u" C0603 80.899,55.677 r90 top
C32 "0.1u" CAPC1608X95N 79.375,55.702 r90 top
C33 "10u" C0603 78.588,61.849 r90 top
C34 "0.1u" CAPC1608X95N 76.886,60.731 r90 top
C35 "12p" CAPC1608X97N 50.648,76.454 r0 top
C36 "12p" CAPC1608X97N 50.698,80.061 r0 top
C37 "8p" CBR04C160F5GAC 47.066,26.949 r180 top
C38 "10u" C0603 62.484,35.458 r90 top
C39 "2u2" CAPC1608X90N 69.342,7.493 r270 top
C40 "2u2" CAPC1608X90N 51.435,34.29 r180 top
C41 "0.1u" CAPC1608X95N 48.616,13.487 r270 top
C42 "10u" C0603 45.618,13.437 r270 top
C43 "4n7" C0603 5.207,63.881 r180 top
C44 "4n7" C0603 5.207,62.103 r180 top
C45 "12p" CAPC1608X97N 15.24,65.278 r0 top
C46 "12p" CAPC1608X97N 26.416,64.008 r180 top
C47 "8p" CBR04C160F5GAC 44.552,26.949 r0 top
C48 "0.1u" CAPC1608X95N 48.768,32.639 r180 top
C49 "10u" C0603 54.418,55.283 r180 top
C50 "0.1u" CAPC1608X95N 58.609,56.299 r90 top
C51 "10u" C0603 50.038,58.217 r90 top
C52 "0.1u" CAPC1608X95N 48.463,58.166 r90 top
C53 "0.1u" CAPC1608X95N 46.228,53.086 r270 top
C54 "0.1u" CAPC1608X95N 47.727,53.086 r270 top
C55 "2u2" CAPC1608X90N 8.763,60.452 r0 top
C56 "0.1u" CAPC1608X95N 24.257,55.499 r270 top
C57 "2u2" CAPC1608X90N 25.781,55.499 r270 top
C58 "2u2" CAPC1608X90N 8.636,65.786 r0 top
D1 "EDL+GREEN" LEDM2012X80N 90.322,41.148 r180 top
D2 "ESD5V" SODFL1006X40N 70.612,71.628 r90 top
D3 "TVS 0.3pF" SP320501ETG 50.343,74.041 r0 top
D4 "ESD 3V3" SODFL1006X40N 10.744,37.922 r0 top
D5 "ESD 3V3" SODFL1006X40N 10.752,36.83 r0 top
D6 "ESD 3V3" SODFL1006X40N 10.752,34.646 r0 top
D7 "ESD 3V3" SODFL1006X40N 10.752,32.487 r0 top
D8 "ESD 3V3" SODFL1006X40N 13.868,40.767 r0 top
F1 "0.75A" PTS120630V012 74.168,72.898 r0 top
J1 "EJ-ANTGNSSCP" ANTGNSSCPTH18L1 50,70.392 r180 bottom locked
J2 "U.FL" CONUFL001SMDT 55.143,75.26 r270 top
J3 "EJ+FTSH2X7" FTSH-107-XX-YYY-DV-K-A-P 78.501,17.127 r270 bottom
J4 "EJ-JST2x1" S2BZRLFSN 72.085,77.064 r180 top
J5 "USBC_IP67" USB472003A 91.542,50 r90 top
J6 "SDCARD" 1051620001 21.06,35.479 r90 bottom locked
J10 "52745-0696" 527450696 14.859,63.246 r270 bottom
J11 "52745-1297" 527451297 14.859,49.911 r270 bottom
L1 "27n" LQG15WH0N7B02D 25.622,84.404 r0 top
L3 "6N8 RF" LQW15CNR20J00B 45.891,81.356 r180 top
L4 "2u2" INDPM5752X300N 82.575,35.941 r270 top
M1 "MTH-3MM" MountingHole_3.0mm_NPTH 15,25 r180 bottom locked
M2 "MTH-3MM" MountingHole_3.0mm_NPTH 15,75 r180 bottom locked
M3 "MTH-3MM" MountingHole_3.0mm_NPTH 85,75 r180 bottom locked
M4 "MTH-3MM" MountingHole_3.0mm_NPTH 85,25 r180 bottom locked
R1 "0R" RESC1005X37N 50.546,75.26 r0 top
R2 "220K" RESC1608X55N 15.24,66.675 r0 top
R3 "33R" RESC1608X55N 39.548,22.555 r180 top
R4 "33R" RESC1608X55N 35.001,10.973 r90 top
R5 "4k7" RESC1608X50N 5.219,60.452 r180 top
R6 "220K" RESC1608X55N 26.416,65.405 r180 top
R7 "4k7" RESC1608X50N 27.305,58.789 r90 top
R8 "10K" RESC1608X50N 24.257,58.813 r270 top
R9 "10K" RESC1608X50N 25.781,58.801 r90 top
R10 "4k7" RESC1608X50N 5.207,65.786 r180 top
R11 "4k7" RESC1608X50N 11.799,65.786 r0 top
R12 "10K" RESC1608X50N 38.862,25.654 r90 top
R13 "33R" RESC1608X55N 82.601,16.561 r270 top
R14 "33R" RESC1608X55N 75.997,12.014 r270 top
R15 "33R" RESC1608X55N 74.422,11.989 r90 top
R17 "5k1" RESC1608X55N 81.293,47.422 r180 top
R18 "5k1" RESC1608X55N 81.28,52.578 r180 top
R19 "10K" RESC1608X50N 80.874,59.233 r180 top
R21 "1k" RESC1608X50N 75.946,52.793 r90 top
R22 "100k" RESC1608X55N 84.849,62.763 r180 top
R23 "47K" RESC1608X50N 84.975,65.761 r0 top
R24 "10K" RESC1608X50N 82.079,65.761 r0 top
R25 "1k" RESC1608X50N 73.99,57.353 r270 top
R26 "10K" RESC1608X50N 86.284,37.414 r270 top
R27 "33k" RESC1608X55N 76.835,38.735 r270 top
R28 "47K" RESC1608X50N 77.8,44.704 r270 top
R29 "10K" RESC1608X50N 79.324,44.729 r90 top
R30 "10K" RESC1608X50N 26.391,79.108 r270 top
R31 "0R" RESC1005X37N 50,78.266 r90 top
R32 "10K" RESC1608X50N 37.541,79.096 r90 top
R33 "1k" RESC1608X50N 8.636,63.881 r180 top
R34 "1k" RESC1608X50N 8.636,62.103 r180 top
R35 "33R" RESC1608X55N 34.544,75.946 r90 top
R36 "33R" RESC1608X55N 33.02,78.956 r90 top
R39 "33R" RESC1608X55N 16.256,38.354 r0 top
R40 "33R" RESC1608X55N 16.256,36.83 r0 top
R41 "33R" RESC1608X55N 16.256,34.62 r0 top
R42 "33R" RESC1608X55N 16.256,32.436 r0 top
R43 "33R" RESC1608X55N 18.11,40.767 r0 top
R49 "10K" RESC1608X50N 51.193,35.687 r180 top
R52 "33R" RESC1608X55N 15.113,52.273 r0 top
R53 "33R" RESC1608X55N 15.113,50.749 r0 top
R54 "33R" RESC1608X55N 15.113,49.225 r0 top
R56 "33R" RESC1608X55N 47.904,31.191 r0 top
R57 "1k" RESC1608X50N 19.837,16.002 r90 top
R58 "1k" RESC1608X50N 53.01,51.333 r270 top
R59 "10K" RESC1608X50N 44.45,55.118 r270 top
R62 "33R" RESC1608X55N 58.101,49.162 r270 top
R64 "33R" RESC1608X55N 59.625,49.162 r270 top
S1 "PUSH" RKB2SJM250SMTRLFS 66.7,13.538 r180 bottom
S2 "SLW-129956" SLW1299564ARAND 89.82,62.786 r90 top locked
U1 "EU+TESEO-LIV3R" TESEOLIV3R 32.512,86.614 r90 top
U2 "EU+ISM330DLC" LGA-14_1 58.099,52.956 r180 top
U3 "LIS2MDLTR" LGA-12 46.486,55.892 r0 top
U4 "EU+STM32H5" QFP50P2200X2200X160-144N 61.652,21.61 r0 top locked
U5 "EU+AT2659S" SOT95P280X125-6N 42.5,82.337 r180 top
U6 "E22-900M22S" E22-900M22S 23.384,31.986 r180 top locked
U7 "USBLC6-2SC6Y" SOT95P280X145-6N 80.65,50 r180 top
U8 "BQ21040DBVR" SOT95P280X145-6N 76.911,56.693 r270 top
U9 "TPS563252DRLR" SOTFL50P160X60-6N 82.575,40.894 r90 top
U10 "SAW" B39162B4327P810 48.336,81.618 r180 top
U11 "OPA2607" SOIC127P600X175-8N 20.574,63.373 r0 top
U12 "TPS22919" SOT65P210X110-6N 16.713,17.094 r0 top
U13 "TPS22919" SOT65P210X110-6N 50.902,51.349 r90 top
U14 "SYM+FEL_LOGO" FEL_LOGO_MED 60.452,91.059 r180 bottom
U15 "SYM+PCB_INFO" PCB_INFO 73.66,70.485 r270 bottom
U16 "SYM+AIMS_LOGO" AIMS_LOGO 41.275,87.596 r180 bottom
Y1 "24MHz" 830107006509 46.736,19.38 r90 top
Y2 "32.768KHz" 830009709 45.314,28.702 r0 top

## Footprints (in the part's own frame and the unit in brackets; to place one, negate y for a bottom-side part, rotate by r counter-clockwise, add the part's x,y. Pads: shape width x height; smd on the part's side, far side on the other; paste and mask are expansions set on the pad)
527450696 [mm]
  rect 0.3x0.8 smd: 1(-1.25,2.95) 2(-0.75,2.95) 3(-0.25,2.95) 4(0.25,2.95) 5(0.75,2.95) 6(1.25,2.95)
  rect 2.4x3.05 smd: 7(-3.7,1.025) 8(3.7,1.025)
  silkscreen extent -4.55,-3.35 4.55,3.9, body extent -4.55,-3.2 4.55,3.2, height 2
527451297 [mm]
  rect 0.3x0.8 smd: 1(-2.75,2.75) 2(-2.25,2.75) 3(-1.75,2.75) 4(-1.25,2.75) 5(-0.75,2.75) 6(-0.25,2.75) 7(0.25,2.75) 8(0.75,2.75) 9(1.25,2.75) 10(1.75,2.75) 11(2.25,2.75) 12(2.75,2.75)
  rect 2.4x3.05 smd: MP1(-5.2,0.825) MP2(5.2,0.825)
  silkscreen extent -6.05,-2.15 6.05,3.95, body extent -6.05,-2.06 6.05,2.94, height 2
830009709 [mm]
  rect 1.1x1.9 smd: 1(-1.25,0) 2(1.25,0)
  silkscreen extent -0.4,-0.75 0.4,0.75, body extent -1.6,-0.75 1.6,0.75, height 0.75
1051620001 [mm]
  rect 0.5x1 smd: 1(3.55,-7.34) 2(2.45,-7.34) 3(1.35,-7.34) 4(0.25,-7.34) 5(-0.85,-7.34) 6(-1.95,-7.34) 7(-3.05,-7.34) 8(-4.15,-7.34)
  rect 0.72x0.78 smd: 9(5.31,-4.66)
  rect 1.05x1.08 smd: 10(5.325,-3.39)
  rect 1.05x1.2 smd: 11(5.325,-0.78) 12(-5.325,-1.35)
  rect 1.05x2.39 smd: 13(-5.325,-4.535)
  rect 2.91x0.55 smd: 14(1.986,-0.105) 15(-2.204,-0.105)
  silkscreen extent -5.65,-8.18 5.65,-5.36, body extent -5.65,-7.83 5.65,-0.23, height 1.45
830107006509 [mm]
  rect 1.4x1.15 smd: 1(-1.1,-0.8) 2(1.1,-0.8) 3(1.1,0.8) 4(-1.1,0.8)
  body extent -1.7,-1.35 1.7,1.35, height 0.65
AIMS_LOGO [mm]
  silkscreen extent -7.28,-2.14 8.16,2.61
ANTGNSSCPTH18L1 [mm]
  round 1.478 hole 0.95: 1(0,0)
  rect 6.5x6.5 smd: 2(-9,-7.2) 3(9,-7.2) 4(9,10.8) 5(-9,10.8)
  silkscreen extent -10.9,-7.2 9,10.8, body extent -9,-7.2 9,10.8, height 4.01
B39162B4327P810 [mm]
  rect 0.3x0.375 smd: 1(-0.5,0) 2(0,-0.287) 3(0.5,-0.287) 4(0.5,0.287) 5(0,0.287)
  body extent -0.7,-0.55 0.7,0.55, height 0.4
C0603 [mm]
  rect 0.95x1 smd: 1(-0.8,0) 2(0.8,0)
  body extent -0.87,-0.48 0.88,0.47, height 0.87
CAPC1005X55N [mm]
  rect 0.6x0.62 smd: 1(-0.46,0) 2(0.46,0)
  body extent -0.5,-0.25 0.5,0.25, height 0.55
CAPC1608X87N [mm]
  rect 0.78x0.98 smd: 1(-0.7,0) 2(0.7,0)
  body extent -0.87,-0.48 0.88,0.47, height 0.87
CAPC1608X90N [mm]
  rect 0.75x0.94 smd: 1(-0.7,0) 2(0.7,0)
  body extent -0.8,-0.45 0.8,0.45, height 0.8
CAPC1608X95N [mm]
  rect 0.78x0.98 smd: 1(-0.7,0) 2(0.7,0)
  body extent -0.87,-0.48 0.88,0.47, height 0.87
CAPC1608X97N [mm]
  rect 0.84x0.98 smd: 1(-0.67,0) 2(0.67,0)
  body extent -0.8,-0.4 0.8,0.4, height 0.97
CBR04C160F5GAC [mm]
  rect 0.62x0.62 smd: 1(-0.45,0) 2(0.45,0)
  silkscreen extent -1.15,-0.05 -1.05,0.05, body extent -0.52,-0.28 0.53,0.27, height 0.55
CONUFL001SMDT [mm]
  rect 1x1.05 smd: 1(0,-1.525)
  rect 1.05x2.2 smd: 2(1.475,0) 3(-1.475,0)
  silkscreen extent -0.6,-2.6 0.6,1.3, body extent -1.5,-1.68 1.5,1.42, height 1.3
E22-900M22S [mm]
  rrect50% 1.5x0.9 smd: 1(0,0)
  rect 1.5x0.9 smd: 2(0,1.27) 3(0,2.54) 4(0,8.11) 5(0,9.38) 6(0,10.65) 7(0,11.92) 8(0,13.19) 9(0,14.46) 10(0,15.73) 11(0,17) 12(-13.7,17) 13(-13.7,15.73) 14(-13.7,14.46) 15(-13.7,13.19) 16(-13.7,11.92) 17(-13.7,10.65) 18(-13.7,9.38) 19(-13.7,8.11) 20(-13.7,2.54) 21(-13.7,1.27) 22(-13.7,0)
  silkscreen extent -13.85,-1.02 0.8,19, body extent -13.85,-1 0.15,19, height 3.1
FEL_LOGO_MED [mm]
  silkscreen extent -4.81,-5.6 5.01,4.21
FTSH-107-XX-YYY-DV-K-A-P [mm]
  rect 0.74x2.79 smd: 1(-3.81,-2.035) 2(-3.81,2.035) 3(-2.54,-2.035) 4(-2.54,2.035) 5(-1.27,-2.035) 6(-1.27,2.035) 7(0,-2.035) 8(0,2.035) 9(1.27,-2.035) 10(1.27,2.035) 11(2.54,-2.035) 12(2.54,2.035) 13(3.81,-2.035) 14(3.81,2.035)
  round 0.51 hole 1.02 unplated: 15(-3.175,0) 16(3.175,0)
  silkscreen extent -4.44,-3.83 4.44,1.72, body extent -4.45,-4.58 4.45,2.79, height 6.8
INDPM5752X300N [mm]
  rect 2.15x1.7 smd: 1(-2.4,0) 2(2.4,0)
  silkscreen extent -2.85,-2.6 2.85,2.6, body extent -2.85,-2.6 2.85,2.6, height 2.81
LEDM2012X80N [mm]
  rect 1.2x1.05 smd: 1(-0.95,0) 2(0.95,0)
  silkscreen extent 1.8,-0.63 1.8,0.64, body extent -1,-0.63 1,0.63, height 0.7
LGA-12 [mm]
  rect 0.4x0.4 smd: 1(-0.8,0.75) 2(-0.8,0.25) 3(-0.8,-0.25) 4(-0.8,-0.75) 5(-0.25,-0.75) 6(0.25,-0.75) 7(0.8,-0.75) 8(0.8,-0.25) 9(0.8,0.25) 10(0.8,0.75) 11(0.25,0.75) 12(-0.25,0.75)
  silkscreen extent -1.39,0.72 -1.34,0.77, body extent -1,-1 1,1, height 1
LGA-14_1 [mm]
  rect 0.6x0.3 smd: 1(-1.15,0.75) 2(-1.15,0.25) 3(-1.15,-0.25) 4(-1.15,-0.75) 8(1.15,-0.75) 9(1.15,-0.25) 10(1.15,0.25) 11(1.15,0.75)
  rect 0.3x0.6 smd: 5(-0.5,-0.9) 6(0,-0.9) 7(0.5,-0.9) 12(0.5,0.9) 13(0,0.9) 14(-0.5,0.9)
  silkscreen extent -1.83,0.74 -1.8,0.77, body extent -1.5,-1.25 1.5,1.25, height 0.86
LQG15WH0N7B02D [mm]
  rect 0.35x0.65 smd: 1(-0.425,0) 2(0.425,0)
  silkscreen extent 0,-0.25 0,0.25, body extent -0.5,-0.25 0.5,0.25, height 0.55
LQW15CNR20J00B [mm]
  rect 0.5x0.66 smd: 1(-0.45,0) 2(0.45,0)
  silkscreen extent 0,-0.3 0,0.3, body extent -0.5,-0.25 0.5,0.25, height 0.6
MountingHole_3.0mm_NPTH [mm]
  round 4.2 hole 3.2 unplated: 1(0,0)
  silkscreen extent -3.5,-3.5 3.5,3.5
PCB_INFO [mm]
  silkscreen extent 0,0 25.5,8
PTS120630V012 [mm]
  rect 1x1.9 smd: 1(-1.5,0) 2(1.5,0)
  silkscreen extent -0.8,-0.82 0.8,0.82, body extent -1.6,-0.8 1.6,0.8, height 0.71
QFP50P2200X2200X160-144N [mm]
  rect 1.475x0.3 smd: 1(-10.738,8.75) 2(-10.738,8.25) 3(-10.738,7.75) 4(-10.738,7.25) 5(-10.738,6.75) 6(-10.738,6.25) 7(-10.738,5.75) 8(-10.738,5.25) 9(-10.738,4.75) 10(-10.738,4.25) 11(-10.738,3.75) 12(-10.738,3.25) 13(-10.738,2.75) 14(-10.738,2.25) 15(-10.738,1.75) 16(-10.738,1.25) 17(-10.738,0.75) 18(-10.738,0.25) 19(-10.738,-0.25) 20(-10.738,-0.75) 21(-10.738,-1.25) 22(-10.738,-1.75) 23(-10.738,-2.25) 24(-10.738,-2.75) 25(-10.738,-3.25) 26(-10.738,-3.75) 27(-10.738,-4.25) 28(-10.738,-4.75) 29(-10.738,-5.25) 30(-10.738,-5.75) 31(-10.738,-6.25) 32(-10.738,-6.75) 33(-10.738,-7.25) 34(-10.738,-7.75) 35(-10.738,-8.25) 36(-10.738,-8.75) 73(10.738,-8.75) 74(10.738,-8.25) 75(10.738,-7.75) 76(10.738,-7.25) 77(10.738,-6.75) 78(10.738,-6.25) 79(10.738,-5.75) 80(10.738,-5.25) 81(10.738,-4.75) 82(10.738,-4.25) 83(10.738,-3.75) 84(10.738,-3.25) 85(10.738,-2.75) 86(10.738,-2.25) 87(10.738,-1.75) 88(10.738,-1.25) 89(10.738,-0.75) 90(10.738,-0.25) 91(10.738,0.25) 92(10.738,0.75) 93(10.738,1.25) 94(10.738,1.75) 95(10.738,2.25) 96(10.738,2.75) 97(10.738,3.25) 98(10.738,3.75) 99(10.738,4.25) 100(10.738,4.75) 101(10.738,5.25) 102(10.738,5.75) 103(10.738,6.25) 104(10.738,6.75) 105(10.738,7.25) 106(10.738,7.75) 107(10.738,8.25) 108(10.738,8.75)
  rect 0.3x1.475 smd: 37(-8.75,-10.738) 38(-8.25,-10.738) 39(-7.75,-10.738) 40(-7.25,-10.738) 41(-6.75,-10.738) 42(-6.25,-10.738) 43(-5.75,-10.738) 44(-5.25,-10.738) 45(-4.75,-10.738) 46(-4.25,-10.738) 47(-3.75,-10.738) 48(-3.25,-10.738) 49(-2.75,-10.738) 50(-2.25,-10.738) 51(-1.75,-10.738) 52(-1.25,-10.738) 53(-0.75,-10.738) 54(-0.25,-10.738) 55(0.25,-10.738) 56(0.75,-10.738) 57(1.25,-10.738) 58(1.75,-10.738) 59(2.25,-10.738) 60(2.75,-10.738) 61(3.25,-10.738) 62(3.75,-10.738) 63(4.25,-10.738) 64(4.75,-10.738) 65(5.25,-10.738) 66(5.75,-10.738) 67(6.25,-10.738) 68(6.75,-10.738) 69(7.25,-10.738) 70(7.75,-10.738) 71(8.25,-10.738) 72(8.75,-10.738) 109(8.75,10.738) 110(8.25,10.738) 111(7.75,10.738) 112(7.25,10.738) 113(6.75,10.738) 114(6.25,10.738) 115(5.75,10.738) 116(5.25,10.738) 117(4.75,10.738) 118(4.25,10.738) 119(3.75,10.738) 120(3.25,10.738) 121(2.75,10.738) 122(2.25,10.738) 123(1.75,10.738) 124(1.25,10.738) 125(0.75,10.738) 126(0.25,10.738) 127(-0.25,10.738) 128(-0.75,10.738) 129(-1.25,10.738) 130(-1.75,10.738) 131(-2.25,10.738) 132(-2.75,10.738) 133(-3.25,10.738) 134(-3.75,10.738) 135(-4.25,10.738) 136(-4.75,10.738) 137(-5.25,10.738) 138(-5.75,10.738) 139(-6.25,10.738) 140(-6.75,10.738) 141(-7.25,10.738) 142(-7.75,10.738) 143(-8.25,10.738) 144(-8.75,10.738)
  silkscreen extent -11.35,-9.65 9.65,9.65, body extent -11,-11 11,11, height 1.6
RESC1005X37N [mm]
  rect 0.75x0.6 smd: 1(-0.55,0) 2(0.55,0)
  body extent -0.5,-0.25 0.5,0.25, height 0.31
RESC1608X50N [mm]
  rect 0.85x1 smd: 1(-0.75,0) 2(0.75,0)
  body extent -0.79,-0.43 0.79,0.43, height 0.5
RESC1608X55N [mm]
  rect 0.9x0.95 smd: 1(-0.8,0) 2(0.8,0)
  silkscreen extent 0,-0.3 0,0.3, body extent -0.8,-0.4 0.8,0.4, height 0.55
RKB2SJM250SMTRLFS [mm]
  rect 1x0.7 smd: 1(-2.25,1.075) 2(2.25,1.075) 3(-2.25,-1.075) 4(2.25,-1.075)
  silkscreen extent -2.8,-1.6 2.1,2.22, body extent -2.25,-1.6 2.25,1.6, height 2.5
S2BZRLFSN [mm]
  rect 1.2x1.2 hole 0.7: 1(0,0)
  round 1.2 hole 0.7: 2(1.5,0)
  silkscreen extent -1.83,-4.6 3,1.7, body extent -1.52,-4.62 2.98,1.38, height 3.7
SLW1299564ARAND [mm]
  rect 1.5x1.5 hole 1: 1(0,0)
  round 1.5 hole 1: 2(3,0) 3(6,0)
  round 2.625 hole 1.75: 4(-3.25,0) 5(9.25,0)
  silkscreen extent -3.45,-2.8 9.45,3.4, body extent -3.45,-6.8 9.45,2.8, height 6
SODFL1006X40N [mm]
  rect 0.51x0.42 smd: 1(-0.5,0) 2(0.5,0)
  silkscreen extent -0.75,-0.45 0.4,0.45, body extent -0.5,-0.3 0.5,0.3, height 0.4
SOIC127P600X175-8N [mm]
  rect 1.528x0.65 smd: 1(-2.711,1.905) 2(-2.711,0.635) 3(-2.711,-0.635) 4(-2.711,-1.905) 5(2.711,-1.905) 6(2.711,-0.635) 7(2.711,0.635) 8(2.711,1.905)
  silkscreen extent -3.47,-2.45 1.6,2.58, body extent -3.01,-2.45 3.01,2.45, height 1.63
SOT65P210X110-6N [mm]
  rect 1.05x0.4 smd: 1(-0.95,0.65) 2(-0.95,0) 3(-0.95,-0.65) 4(0.95,-0.65) 5(0.95,0) 6(0.95,0.65)
  silkscreen extent -1.48,-1 0.08,1.2, body extent -1.05,-1 1.05,1, height 1.1
SOT95P280X125-6N [mm]
  rect 1.2x0.6 smd: 1(-1.25,0.95) 2(-1.25,0) 3(-1.25,-0.95) 4(1.25,-0.95) 5(1.25,0) 6(1.25,0.95)
  silkscreen extent -1.85,-1.45 0.3,1.6, body extent -1.4,-1.45 1.4,1.45, height 1.25
SOT95P280X145-6N [mm]
  rect 1.2x0.6 smd: 1(-1.25,0.95) 2(-1.25,0) 3(-1.25,-0.95) 4(1.25,-0.95) 5(1.25,0) 6(1.25,0.95)
  silkscreen extent -1.85,-1.46 0.3,1.6, body extent -1.4,-1.46 1.4,1.46, height 1.45
SOTFL50P160X60-6N [mm]
  rect 0.475x0.3 smd: 1(-0.838,0.5) 2(-0.838,0) 3(-0.838,-0.5) 4(0.838,-0.5) 5(0.838,0) 6(0.838,0.5)
  silkscreen extent -1.07,-0.8 0.25,0.9, body extent -0.8,-0.78 0.8,0.82, height 0.6
SP320501ETG [mm]
  rect 0.35x0.6 smd: 1(-0.325,0) 2(0.325,0)
  silkscreen extent -0.4,0.5 -0.3,0.6, body extent -0.5,-0.3 0.5,0.3, height 0.5
TESEOLIV3R [mm]
  rect 0.9x1.6 smd: 1(4.4,4.6) 2(3.3,4.6) 3(2.2,4.6) 4(1.1,4.6) 5(0,4.6) 6(-1.1,4.6) 7(-2.2,4.6) 8(-3.3,4.6) 9(-4.4,4.6) 10(-4.4,-4.6) 11(-3.3,-4.6) 12(-2.2,-4.6) 13(-1.1,-4.6) 14(0,-4.6) 15(1.1,-4.6) 16(2.2,-4.6) 17(3.3,-4.6) 18(4.4,-4.6)
  silkscreen extent -5.05,-3.4 5.05,6, body extent -5.05,-4.85 5.05,4.85, height 2.31
USB472003A [mm]
  rect 0.6x0.9 smd: A1(-3.28,4.25) A12(3.28,4.25)
  rect 0.65x0.9 smd: A4(-2.43,4.25) A9(2.43,4.25)
  rect 0.3x0.9 smd: A5(-1.25,4.25) A6(-0.25,4.25) A7(0.25,4.25) A8(1.25,4.25) B5(1.75,4.25) B6(0.75,4.25) B7(-0.75,4.25) B8(-1.75,4.25)
  rrect50% 0.5x0.8 hole 0.5: MH1(-4.1,4.3) MH2(4.1,4.3)
  rrect50% 1.2x2.1 hole 0.8 slot 1.8 at 90 deg: MH3(-5.65,4) MH4(5.65,4) MH5(-5.65,0) MH6(5.65,0)
  body extent -5.8,-2.93 5.8,4.67, height 2.22

## Part data
C1 C2 C8: library part ECK+120p_50V_0402, "Multilayer Ceramic Capacitors MLCC - SMD/SMT 120 pF 50 VDC 5% 0402 C0G (NP0) AEC-Q200", Arrow Part Number=GCM1555C1H121JA16J, Manufacturer_Name="Murata Electronics", Mouser Part Number=81-GCM1555C1H121JA6J, Arrow Price/Stock=https://www.arrow.com/en/products/gcm1555c1h121ja16j/murata-manufacturing?region=nac, Datasheet Link=https://search.murata.co.jp/Ceramy/image/img/A01X/G101/ENG/GCM1555C1H121JA16-01A.pdf, Height=0.55mm, Manufacturer_Part_Number=GCM1555C1H121JA16J, Mouser Price/Stock=https://www.mouser.co.uk/ProductDetail/Murata-Electronics/GCM1555C1H121JA16J?qs=bGEzvQhTDnbTpDR%252B7iTnIA%3D%3D
C3 C7 C24 C31 C33 C38 C42 C49 C51: library part ECK+10u10V, "10 VDC, 20 %, X5R", Arrow Part Number=C0603C106M8PACTU, Manufacturer_Name=KEMET, Mouser Part Number=80-C0603C106M8PACTU, Arrow Price/Stock=https://www.arrow.com/en/products/c0603c106m8pactu/kemet-corporation?region=nac, Datasheet Link=https://content.kemet.com/datasheets/KEM_C1006_X5R_SMD.pdf, Height=0.87mm, Manufacturer_Part_Number=C0603C106M8PACTU, Mouser Price/Stock=https://www.mouser.co.uk/ProductDetail/KEMET/C0603C106M8PACTU?qs=gt1LBUVyoHk6B7S%252BOYJa0A%3D%3D
C4 C5 C6 C9 C10 C11 C12 C13 C14 C15 C16 C17 C18 C19 C20 C21 C25 C28 C32 C34 C41 C48 C50 C52 C53 C54 C56: library part ECK+100n16V, "16V 0.1uF XR7 0603 10%", Arrow Part Number=C0603C104K4RAC-TU, Manufacturer_Name=KEMET, Mouser Part Number=80-C0603C104K4RAC, Arrow Price/Stock=https://www.arrow.com/en/products/c0603c104k4ractu/kemet-corporation, Datasheet Link=https://connect.kemet.com:7667/gateway/IntelliData-ComponentDocumentation/1.0/download/specsheet/C0603C104K4RACTU, Height=0.95mm, Manufacturer_Part_Number=C0603C104K4RAC-TU
C22 C23 C35 C36 C45 C46: library part ECK+12p10V, "Multilayer Ceramic Capacitors MLCC - SMD/SMT 0603 12pF 10volts C0G(N0P) 1%", Arrow Part Number=VJ0603A120FXQCW1BC, Manufacturer_Name=Vishay, Mouser Part Number=77-VJ0603A120FXQCBC, Arrow Price/Stock=https://www.arrow.com/en/products/vj0603a120fxqcw1bc/vishay, Datasheet Link=https://www.vishay.com/docs/45199/vjcommercialseries.pdf, Height=0.97mm, Manufacturer_Part_Number=VJ0603A120FXQCW1BC, Mouser Price/Stock=https://www.mouser.com/Search/Refine.aspx?Keyword=77-VJ0603A120FXQCBC
C26: library part ECK+1n16V, "16 VDC, 10 %, X7R", Manufacturer_Name=KEMET, Manufacturer_Part_Number=C0603C102K4RECTU, Datasheet Link=https://content.kemet.com/datasheets/KEM_C1090_X7R_ESD.pdf, Height=0.87mm
C27 C29 C30: library part ECK+20u16V, "Capacitor", Arrow Part Number=C0603C200K4HACAUTO, Manufacturer_Name="Yageo Group", Mouser Part Number=80-C0603C200K4HAUTO, Arrow Price/Stock=https://www.arrow.com/en/products/c0603c200k4hacauto/kemet-corporation?utm_currency=USD&region=nac, Datasheet Link=https://www.yageogroup.com/content/datasheet/asset/file/KEM_C1007_X8R_ULTRA_150C_SMD, Height=0.87mm, Manufacturer_Part_Number=C0603C200K4HACAUTO, Mouser Price/Stock=https://www.mouser.co.uk/ProductDetail/KEMET/C0603C200K4HACAUTO?qs=j%252B1pi9TdxUZOUXgrptGPiw%3D%3D
C37 C47: library part ECK+8p25V_0402, "25V 8pF C0G 0402 0.25pF", Arrow Part Number=CBR04C809C3GAC, Manufacturer_Name="Yageo Group", Mouser Part Number=80-CBR04C809C3GAC, Arrow Price/Stock=https://www.arrow.com/en/products/cbr04c809c3gac/kemet-corporation?region=nac, Datasheet Link=https://www.yageogroup.com/content/datasheet/asset/file/KEM_C1030_CBR_SMD, Height=0.55mm, Manufacturer_Part_Number=CBR04C809C3GAC, Mouser Price/Stock=https://www.mouser.co.uk/ProductDetail/KEMET/CBR04C809C3GAC?qs=kpVq%2FgIAs53vwZ%252BGNvfyMA%3D%3D
C39 C40 C55 C57 C58: library part ECK+2.2u16V, "Multilayer Ceramic Capacitors MLCC - SMD/SMT 2.2 uF 16 VDC 10% 0603 X6S", Arrow Part Number=GRM188C81C225KA12D, Manufacturer_Name="Murata Electronics", Mouser Part Number=81-GRM188C81C225KA2D, Arrow Price/Stock=https://www.arrow.com/en/products/grm188c81c225ka12d/murata-manufacturing?utm_currency=USD&region=nac, Datasheet Link=https://search.murata.co.jp/Ceramy/image/img/A01X/G101/ENG/GRM188C81C225KA12-04A.pdf, Height=0.9mm, Manufacturer_Part_Number=GRM188C81C225KA12D, Mouser Price/Stock=https://www.mouser.co.uk/ProductDetail/Murata-Electronics/GRM188C81C225KA12D?qs=O5cugoO6nwevZQeqg2lgHQ%3D%3D
C43 C44: library part ECK+4n750V, "50 VDC, 10 %, X7R", Arrow Part Number=C0603C472K5RACTU, Manufacturer_Name=KEMET, Arrow Price/Stock=https://www.arrow.com/en/products/c0603c472k5ractu/kemet-corporation?region=nac, Datasheet Link=https://content.kemet.com/datasheets/KEM_C1002_X7R_SMD.pdf, Height=0.87mm, Manufacturer_Part_Number=C0603C472K5RACTU
D1: "LED GREEN,  3.2 V", Manufacturer_Name="Wurth Elektronik", Manufacturer_Part_Number=150080GS75000, Mouser Part Number=710-150080GS75000, Datasheet Link=https://katalog.we-online.com/led/datasheet/150080GS75000.pdf, Height=0.8mm, Mouser Price/Stock=https://www.mouser.co.uk/ProductDetail/Wurth-Elektronik/150080GS75000?qs=2kOmHSv6VfQRoTEZVk1mGA%3D%3D
D2: library part ED+ESD5V, "ESD Protection Diode, Bidirectional, VRWM=5 V, VBR=6 V typ., VC=14 V max, IPP=6 A, Cd=20 pF, ±30 kV ESD, SOD-923", Arrow Part Number=D5V0L1B2S9-7, Manufacturer_Name="Diodes Incorporated", Mouser Part Number=621-D5V0L1B2S9-7, Arrow Price/Stock=https://www.arrow.com/en/products/d5v0l1b2s9-7/diodes-incorporated?utm_currency=USD&region=nac, Datasheet Link=https://www.diodes.com/assets/Datasheets/D5V0L1B2S9.pdf, Height=0.4mm, Manufacturer_Part_Number=D5V0L1B2S9-7, Mouser Price/Stock=https://www.mouser.co.uk/ProductDetail/Diodes-Incorporated/D5V0L1B2S9-7?qs=bLNvM6dkO6SRwc%2Fzm27P2g%3D%3D
D3: library part ED+TVSSP3205_3V3_0.3pF, "ESD Protection Diodes / TVS Diodes ESD 3.3V UNI, Working Voltage: 3.3 V, Clamping Voltage: 12 V, Breakdown Voltage: 3.6 V, Ipp - Peak Pulse Current: 4 A , Cd - Diode Capacitance: 0.3 pF", Arrow Part Number=SP3205-01ETG, Manufacturer_Name=LITTELFUSE, Mouser Part Number=576-SP3205-01ETG, Arrow Price/Stock=https://www.arrow.com/en/products/sp3205-01etg/littelfuse?utm_currency=USD&region=nac, Datasheet Link=https://4donline.ihs.com/images/VipMasterIC/IC/LFSI/LFSI-S-A0010724013/LFSI-S-A0010724013-1.pdf?hkey=6D3A4C79FDBF58556ACFDE234799DDF0, Height=0.55mm, Manufacturer_Part_Number=SP3205-01ETG, Mouser Price/Stock=https://www.mouser.co.uk/ProductDetail/Littelfuse/SP3205-01ETG?qs=vHuUswq2%252BswfNhVD4WkB%252BQ%3D%3D
D4 D5 D6 D7 D8: library part ED+ESD3.3V15pF, "Vesd (ESD contact/air gap): 18 kV, Cd (Diode Capacitance): 15 pF, Working Voltage: 3.3 V, Breakdown Voltage: 5 V, Clamping Voltage: 10.5 V", Arrow Part Number=ESD9B3.3ST5G, Manufacturer_Name=onsemi, Mouser Part Number=863-ESD9B3.3ST5G, Arrow Price/Stock=https://www.arrow.com/en/products/esd9b3.3st5g/on-semiconductor?utm_currency=USD&region=nac, Datasheet Link=https://www.onsemi.com/pub/Collateral/ESD9B-D.PDF, Height=0.4mm, Manufacturer_Part_Number=ESD9B3.3ST5G, Mouser Price/Stock=https://www.mouser.co.uk/ProductDetail/onsemi/ESD9B3.3ST5G?qs=yU2N9dt%252BrfmXrPf3vhgUEA%3D%3D
F1: library part EF+0.75A6V_1206, "Resettable Fuses - PPTC 1206 6V 0.75A 1.1W SMD AEC-Q200 High Temp", Manufacturer_Name=YAGEO, Manufacturer_Part_Number=SMDH1206B075TF, Mouser Part Number=603-SMDH1206B075TF, Datasheet Link=https://cz.mouser.com/datasheet/3/508/1/smdh1206.pdf, Mouser Price/Stock=https://cz.mouser.com/ProductDetail/YAGEO/SMDH1206B075TF?qs=jcD%2FCkGBYeN0SVo4GFcQbQ%3D%3D
J1: "Antennas ANTENNA GNSS L1 18X18 THM", Manufacturer_Name=Linx, Manufacturer_Part_Number=ANT-GNSSCP-TH18L1, Datasheet Link=https://www.te.com/commerce/DocumentDelivery/DDEController?Action=srchrtrv&DocNm=C-ANT-GNSSCP-TH18L1&DocType=Customer%20Drawing&DocLang=English&DocFormat=pdf&PartCntxt=ANT-GNSSCP-TH18L1, Height=4mm
J2: library part EJ+U.FL, "RF Connectors / Coaxial Connectors T&R U.FL Straight Surface Mount Jack 6 GHz 50 Ohms", Arrow Part Number=CONUFL001-SMD-T, Manufacturer_Name="TE Connectivity", Mouser Part Number=N/A, Arrow Price/Stock=https://www.arrow.com/en/products/conufl001-smd-t/te-connectivity?utm_currency=USD&region=nac, Datasheet Link=https://eu.mouser.com/datasheet/2/418/9/ENG_DS_CONUFL001_SMD_T_B-3238717.pdf, Height=1.3mm, Manufacturer_Part_Number=CONUFL001-SMD-T, Mouser Price/Stock=https://www.mouser.co.uk/ProductDetail/TE-Connectivity/CONUFL001-SMD-T?qs=3Rah4i%252BhyCHmRzMH%252BkLkPQ%3D%3D
J3: "Connector", Arrow Part Number=FTSH-107-01-L-DV-K-A-P, Manufacturer_Name=SAMTEC, Mouser Part Number=200-FTSH10701LDVKAP, Arrow Price/Stock=https://www.arrow.com/en/products/ftsh-107-01-l-dv-k-a-p/samtec?region=nac, Datasheet Link=http://suddendocs.samtec.com/prints/ftsh-1xx-xx-xxx-dv-xxx-xxx-mkt.pdf, Manufacturer_Part_Number=FTSH-107-01-L-DV-K-A-P, Mouser Price/Stock=https://www.mouser.co.uk/ProductDetail/Samtec/FTSH-107-01-L-DV-K-A-P?qs=PB6%2FjmICvI2QizANfiVr3Q%3D%3D
J4: "Konektor: kabel-pl.spoj; zásuvka; vidlice; PIN: 2; PH; 2A; 100V; SMT", Arrow Part Number="S2B-ZR (LF)(SN)", Manufacturer_Name="JST (JAPAN SOLDERLESS TERMINALS)", Arrow Price/Stock=https://www.arrow.com/en/products/s2b-zr-lf-sn/jst-manufacturing?region=europe, Datasheet Link=https://www.jst-mfg.com/product/pdf/eng/eZH.pdf?6794690f4fd86, Height=3.7mm, Manufacturer_Part_Number="S2B-ZR (LF)(SN)"
J5: library part EJ-USBC_IP67, "USB Connectors USB2.0 TypeC Recpt., 3u Gold, 16P Horz Mid Mount SMT, 1.13mm O-set, IP67", Manufacturer_Name="GCT (GLOBAL CONNECTOR TECHNOLOGY)", Manufacturer_Part_Number=USB4720-03-A, Mouser Part Number=640-USB472003A, Datasheet Link=https://www.gct.co/files/drawings/USB4720.pdf, Height=3.9mm, Mouser Price/Stock=https://www.mouser.co.uk/ProductDetail/GCT/USB4720-03-A?qs=Z%252BL2brAPG1IK%252BbxHmYg8zQ%3D%3D
J6: library part EMECH+SDCARD, "Memory Card Connectors Micro SD Push Pull SMT 1.15mm", Manufacturer_Name=Molex, Manufacturer_Part_Number=105162-0001, Mouser Part Number=538-105162-0001, Datasheet Link=http://www.molex.com/webdocs/datasheets/pdf/en-us//1051620001_MEMORY_CARD_SOCKET.pdf, Height=1.45mm, Mouser Price/Stock=https://www.mouser.co.uk/ProductDetail/Molex/105162-0001?qs=1fNsfHe5VsK8daqlgKxZfQ%3D%3D
J10: library part EJ+52745-0696, "FFC & FPC Connectors RA SMT ZIF TOP 6P ROHS COMPLIANT, Pitch: 0.5 mm, Mounting Angle / Contact Location: Right Angle / Top Contact, Current Rating: 500 mA, Voltage Rating: 50 V", Manufacturer_Name=Molex, Mouser Part Number=538-52745-0696, Datasheet Link=https://www.molex.com/content/dam/molex/molex-dot-com/products/automated/en-us/salesdrawingpdf/527/52745/527450696_sd.pdf?inline, Height=2.2mm, Manufacturer_Part_Number=52745-0696, Mouser Price/Stock=https://www.mouser.co.uk/ProductDetail/Molex/52745-0696?qs=AU9XQWArEY9ei7I32bfdLw%3D%3D
J11: library part EJ+52745-1297, "FFC & FPC Connectors RA SMT ZIF TOP 12P GOLD, Pitch: 0.5 mm, Mounting Angle / Contact Location: Right Angle / Top Contact, Current Rating: 500 mA, Voltage Rating: 50 V", Manufacturer_Name=Molex, Mouser Part Number=538-52745-1297, Datasheet Link=https://www.molex.com/pdm_docs/sd/527451297_sd.pdf, Height=2mm, Manufacturer_Part_Number=52745-1297, Mouser Price/Stock=https://www.mouser.co.uk/ProductDetail/Molex/52745-1297?qs=nDwhpid8gJaCgIkitRUygg%3D%3D
L1: library part EL+27n_0402, "LQG15HS27NJ02D RF Inductors - SMD 27 NH 5%", Manufacturer_Name=LQG15HS27NJ02D, Mouser Part Number=81-LQG15HS27NJ02D, Datasheet Link=https://cz.mouser.com/datasheet/3/76/2/JELF243B_0010.pdf, Manufacturer_Part_Number=LQG15HS27NJ02D, Mouser Price/Stock=https://mou.sr/4wJB6bA
L3: library part EL+6N8RF_0402, "RF Inductor"
L4: library part EL+2.2u5.5A, "Power Inductors - SMD 2.2uH 20%", Manufacturer_Name=Bourns, Manufacturer_Part_Number=SRP5030TA-2R2M, Mouser Part Number=652-SRP5030TA-2R2M, Datasheet Link=https://cz.mouser.com/datasheet/3/40/1/srp5030ta.pdf, Mouser Price/Stock=https://cz.mouser.com/ProductDetail/Bourns/SRP5030TA-2R2M?qs=ZwKJWZfDtNgb6JbyacG30w%3D%3D
M1 M2 M3 M4: library part EMECH-MTH-3MM
R1 R31: library part ER+0R_0402, "Thick Film Resistors - SMD 0 Ohms 1/16 W 50 V 1% 0402 - 55 C + 155 C AEC-Q200", Arrow Part Number=AC0402FR-070RL, Manufacturer_Name="Yageo Group", Mouser Part Number=603-AC0402FR-070RL, Arrow Price/Stock=https://www.arrow.com/en/products/ac0402fr-070rl/yageo?region=nac, Datasheet Link=https://www.yageo.com/upload/media/product/productsearch/datasheet/rchip/PYu-AC_51_RoHS_L_11.pdf, Height=0.37mm, Manufacturer_Part_Number=AC0402FR-070RL, Mouser Price/Stock=https://www.mouser.co.uk/ProductDetail/YAGEO/AC0402FR-070RL?qs=ygRr%2FtkhtettkzGxq5kFaA%3D%3D
R2 R6: library part ER+220K, "Thick Film Resistors - SMD 1/8 Watt 220Kohms 1%", Manufacturer_Name=Vishay, Manufacturer_Part_Number=CRCW0603220KFKEA, Mouser Part Number=71-CRCW0603-220K-E3, Datasheet Link=https://www.vishay.com/docs/20035/dcrcwe3.pdf, Height=0.55mm, Mouser Price/Stock=https://cz.mouser.com/ProductDetail/Vishay/CRCW0603220KFKEA?qs=pVi9qluBdEGy7pbAV1jqkQ%3D%3D
R3 R4 R13 R14 R15 R39 R40 R41 R42 R43 R52 R53 R54 R56 R62 R64: library part ER+33R, "Resistor 1% 0.1W", Manufacturer_Name=ROYALOHM, Manufacturer_Part_Number=0603WAF330JT5E, Mouser Part Number=303-0603WAF330JT5E, Datasheet Link=https://datasheet.lcsc.com/lcsc/2206010116_UNI-ROYAL-Uniroyal-Elec-0603WAF330JT5E_C23140.pdf, Height=0.55mm, Mouser Price/Stock=https://www.mouser.co.uk/ProductDetail/Royalohm/0603WAF330JT5E?qs=e8oIoAS2J1RitKiKgULsBA%3D%3D
R5 R7 R10 R11: library part ER+4k7, "Resistor 1%, 0.1W", Arrow Part Number=CRCW06034K70FKEAHP, Manufacturer_Name=Vishay, Mouser Part Number=71-CRCW06034K70FKEAH, Arrow Price/Stock=https://www.arrow.com/en/products/crcw06034k70fkeahp/vishay?region=nac, Datasheet Link=http://www.farnell.com/datasheets/1885357.pdf, Height=0.5mm, Manufacturer_Part_Number=CRCW06034K70FKEAHP, Mouser Price/Stock=https://www.mouser.co.uk/ProductDetail/Vishay-Dale/CRCW06034K70FKEAHP?qs=k2%2FDWSARqgF9tclCHvhGkQ%3D%3D
R8 R9 R12 R19 R24 R26 R29 R30 R32 R49 R59: library part ER+10K, "Resistor 1%, 0.1W", Arrow Part Number=CRCW060310K0FKEA, Manufacturer_Name=Vishay, Mouser Part Number=71-CRCW0603-10K-E3, Arrow Price/Stock=https://www.arrow.com/en/products/crcw060310k0fkea/vishay?region=europe, Datasheet Link=http://www.vishay.com/docs/20035/dcrcwe3.pdf, Height=0.5mm, Manufacturer_Part_Number=CRCW060310K0FKEA, Mouser Price/Stock=https://www.mouser.co.uk/ProductDetail/Vishay-Dale/CRCW060310K0FKEA?qs=pAO1Z172M84BVnhDjtnsoQ%3D%3D
R17 R18: library part ER+5k1, "Thick Film Resistors - SMD 1/10Watt 5.1Kohms 1%", Arrow Part Number=CRCW06035K10FKEBC, Manufacturer_Name=Vishay, Mouser Part Number=71-CRCW06035K10FKEBC, Arrow Price/Stock=https://www.arrow.com/en/products/crcw06035k10fkebc/vishay?region=nac, Datasheet Link=https://www.vishay.com/docs/28773/crcwce3.pdf, Height=0.55mm, Manufacturer_Part_Number=CRCW06035K10FKEBC, Mouser Price/Stock=https://www.mouser.co.uk/ProductDetail/Vishay-Dale/CRCW06035K10FKEBC?qs=wd5RIQLrsJiajonkePuzqw%3D%3D
R21 R25 R33 R34 R57 R58: library part ER+1K, "Resistor 1%, 0.1W", Arrow Part Number=CRCW06031K00FKEA, Manufacturer_Name=Vishay, Mouser Part Number=71-CRCW0603-1.0K-E3, Arrow Price/Stock=https://www.arrow.com/en/products/crcw06031k00fkea/vishay?region=europe, Datasheet Link=http://www.vishay.com/docs/20035/dcrcwe3.pdf, Height=0.5mm, Manufacturer_Part_Number=CRCW06031K00FKEA, Mouser Price/Stock=https://www.mouser.co.uk/ProductDetail/Vishay-Dale/CRCW06031K00FKEA?qs=CToX950LohJasujQx7GY3g%3D%3D
R22: library part ER+100k, "Thick Film Resistors 0603 - SMD 1/10Watt 100Kohms 1% Commercial Use", Manufacturer_Name="Yageo Group", Manufacturer_Part_Number=AC0603FR-10100KL, Mouser Part Number=603-AC0603FR-10100KL, Datasheet Link=https://www.yageo.com/upload/media/product/productsearch/datasheet/rchip/PYu-AC_51_RoHS_L_10.pdf, Height=0.55mm, Mouser Price/Stock=https://www.mouser.com/Search/Refine.aspx?Keyword=603-AC0603FR-10100KL
R23 R28: library part ER+47K, "Resistor 1%, 0.1W", Arrow Part Number=CRCW060347K0FKEA, Manufacturer_Name=Vishay, Mouser Part Number=71-CRCW0603-47K-E3, Arrow Price/Stock=https://www.arrow.com/en/products/crcw060347k0fkea/vishay?region=nac, Datasheet Link=http://www.vishay.com/docs/20035/dcrcwe3.pdf, Height=0.5mm, Manufacturer_Part_Number=CRCW060347K0FKEA, Mouser Price/Stock=https://www.mouser.co.uk/ProductDetail/Vishay-Dale/CRCW060347K0FKEA?qs=yJVtgANCw03gcaACf6JZKA%3D%3D
R27: library part ER+33k, "Thick Film Resistors - SMD General Purpose Chip Resistor 0603, 33kOhms, 1%, 1/10W", Manufacturer_Name="Yageo Group", Manufacturer_Part_Number=RC0603FR-1333KL, Mouser Part Number=603-RC0603FR-1333KL, Datasheet Link=http://www.yageo.com/documents/recent/PYu-RC0603_51_RoHS_L_v5.pdf, Height=0.55mm, Mouser Price/Stock=https://www.mouser.co.uk/ProductDetail/Yageo/RC0603FR-1333KL?qs=IuGqVx9wL0LwIipsoMfsXg%3D%3D
R35 R36: library part ER+33R, "Resistor 0603 1/10W 1%", Manufacturer_Name=ROYALOHM, Manufacturer_Part_Number=0603WAF330JT5E, Mouser Part Number=303-0603WAF330JT5E, Datasheet Link=https://datasheet.lcsc.com/lcsc/2206010116_UNI-ROYAL-Uniroyal-Elec-0603WAF330JT5E_C23140.pdf, Height=0.55mm, Mouser Price/Stock=https://www.mouser.co.uk/ProductDetail/Royalohm/0603WAF330JT5E?qs=e8oIoAS2J1RitKiKgULsBA%3D%3D
S1: library part EB+PUSH2, "Small Tact Switch", Arrow Part Number="RKB2SJM250SMTR LFS", Manufacturer_Name="C & K COMPONENTS", Mouser Part Number=611-RKB2SJM250SMTRLF, Arrow Price/Stock=null?region=nac, Datasheet Link=https://www.ckswitches.com/media/3130/ck_rk_datasheet.pdf, Height=2.7mm, Manufacturer_Part_Number="RKB2SJM250SMTR LFS", Mouser Price/Stock=https://www.mouser.co.uk/ProductDetail/CK/RKB2SJM250SMTR-LFS?qs=iLbezkQI%252Bsj518EgFgehgw%3D%3D
S2: library part ESW-SLW-129956, "Slide Switch, Right Angle, max. 50 VDC, max. 300 mA, ON - ON", Manufacturer_Name="Same Sky", Manufacturer_Part_Number=SLW-129956-4A-RA-N-D, Mouser Part Number=179-SLW1299564ARAND, Datasheet Link=https://www.sameskydevices.com/product/resource/slw-129956-4a-ra-n-d.pdf, Height=6.3mm, Mouser Price/Stock=https://www.mouser.co.uk/ProductDetail/Same-Sky/SLW-129956-4A-RA-N-D?qs=IKkN%2F947nfAoCoaoyLYE3A%3D%3D
U1: "Tiny ROM GNSS module", Arrow Part Number=TESEO-LIV3R, Manufacturer_Name=STMicroelectronics, Mouser Part Number=511-TESEO-LIV3R, Arrow Price/Stock=https://www.arrow.com/en/products/teseo-liv3r/stmicroelectronics?utm_currency=USD&region=nac, Datasheet Link=https://www.st.com/resource/en/datasheet/teseo-liv3r.pdf, Height=2.3mm, Manufacturer_Part_Number=TESEO-LIV3R, Mouser Price/Stock=https://www.mouser.co.uk/ProductDetail/STMicroelectronics/TESEO-LIV3R?qs=ZSypp649SOXG7EmhCFcBlw%3D%3D
U2: "ISM330DLCTR iNEMO 6-axis IMU: 3-axis accelerometer and 3-axis gyroscope with digital output", Arrow Part Number=ISM330DLCTR, Manufacturer_Name=STMicroelectronics, Mouser Part Number=511-ISM330DLCTR, Arrow Price/Stock=https://www.arrow.com/en/products/ism330dlctr/stmicroelectronics.html?utm_currency=USD&region=nac, Datasheet Link=https://www.st.com/resource/en/datasheet/ism330dlc.pdf, Manufacturer_Part_Number=ISM330DLCTR, Mouser Price/Stock=https://www.mouser.co.uk/ProductDetail/STMicroelectronics/ISM330DLCTR?qs=HXFqYaX1Q2xJsRh9qTmUlw%3D%3D
U3: library part EU+LIS2MDLTR, "Magnetic Sensors Digital output magnetic sensor: ultralow-power, high-performance 3-axis magnetom", Manufacturer_Name=STMicroelectronics, Mouser Part Number=511-LIS2MDLTR, Arrow Part Number=LIS2MDLTR, Arrow Price/Stock=https://www.arrow.com/en/products/lis2mdltr/stmicroelectronics?utm_currency=USD&region=nac, Datasheet Link=https://www.st.com/resource/en/datasheet/lis2mdl.pdf, Manufacturer_Part_Number=LIS2MDLTR, Mouser Price/Stock=https://www.mouser.co.uk/ProductDetail/STMicroelectronics/LIS2MDLTR?qs=5aG0NVq1C4wS0n6b5NiBNQ%3D%3D